# EAGLE board SparkX_smol_ZOE-M8Q-Panel (EAGLE 9.6.2), part 1 of 11
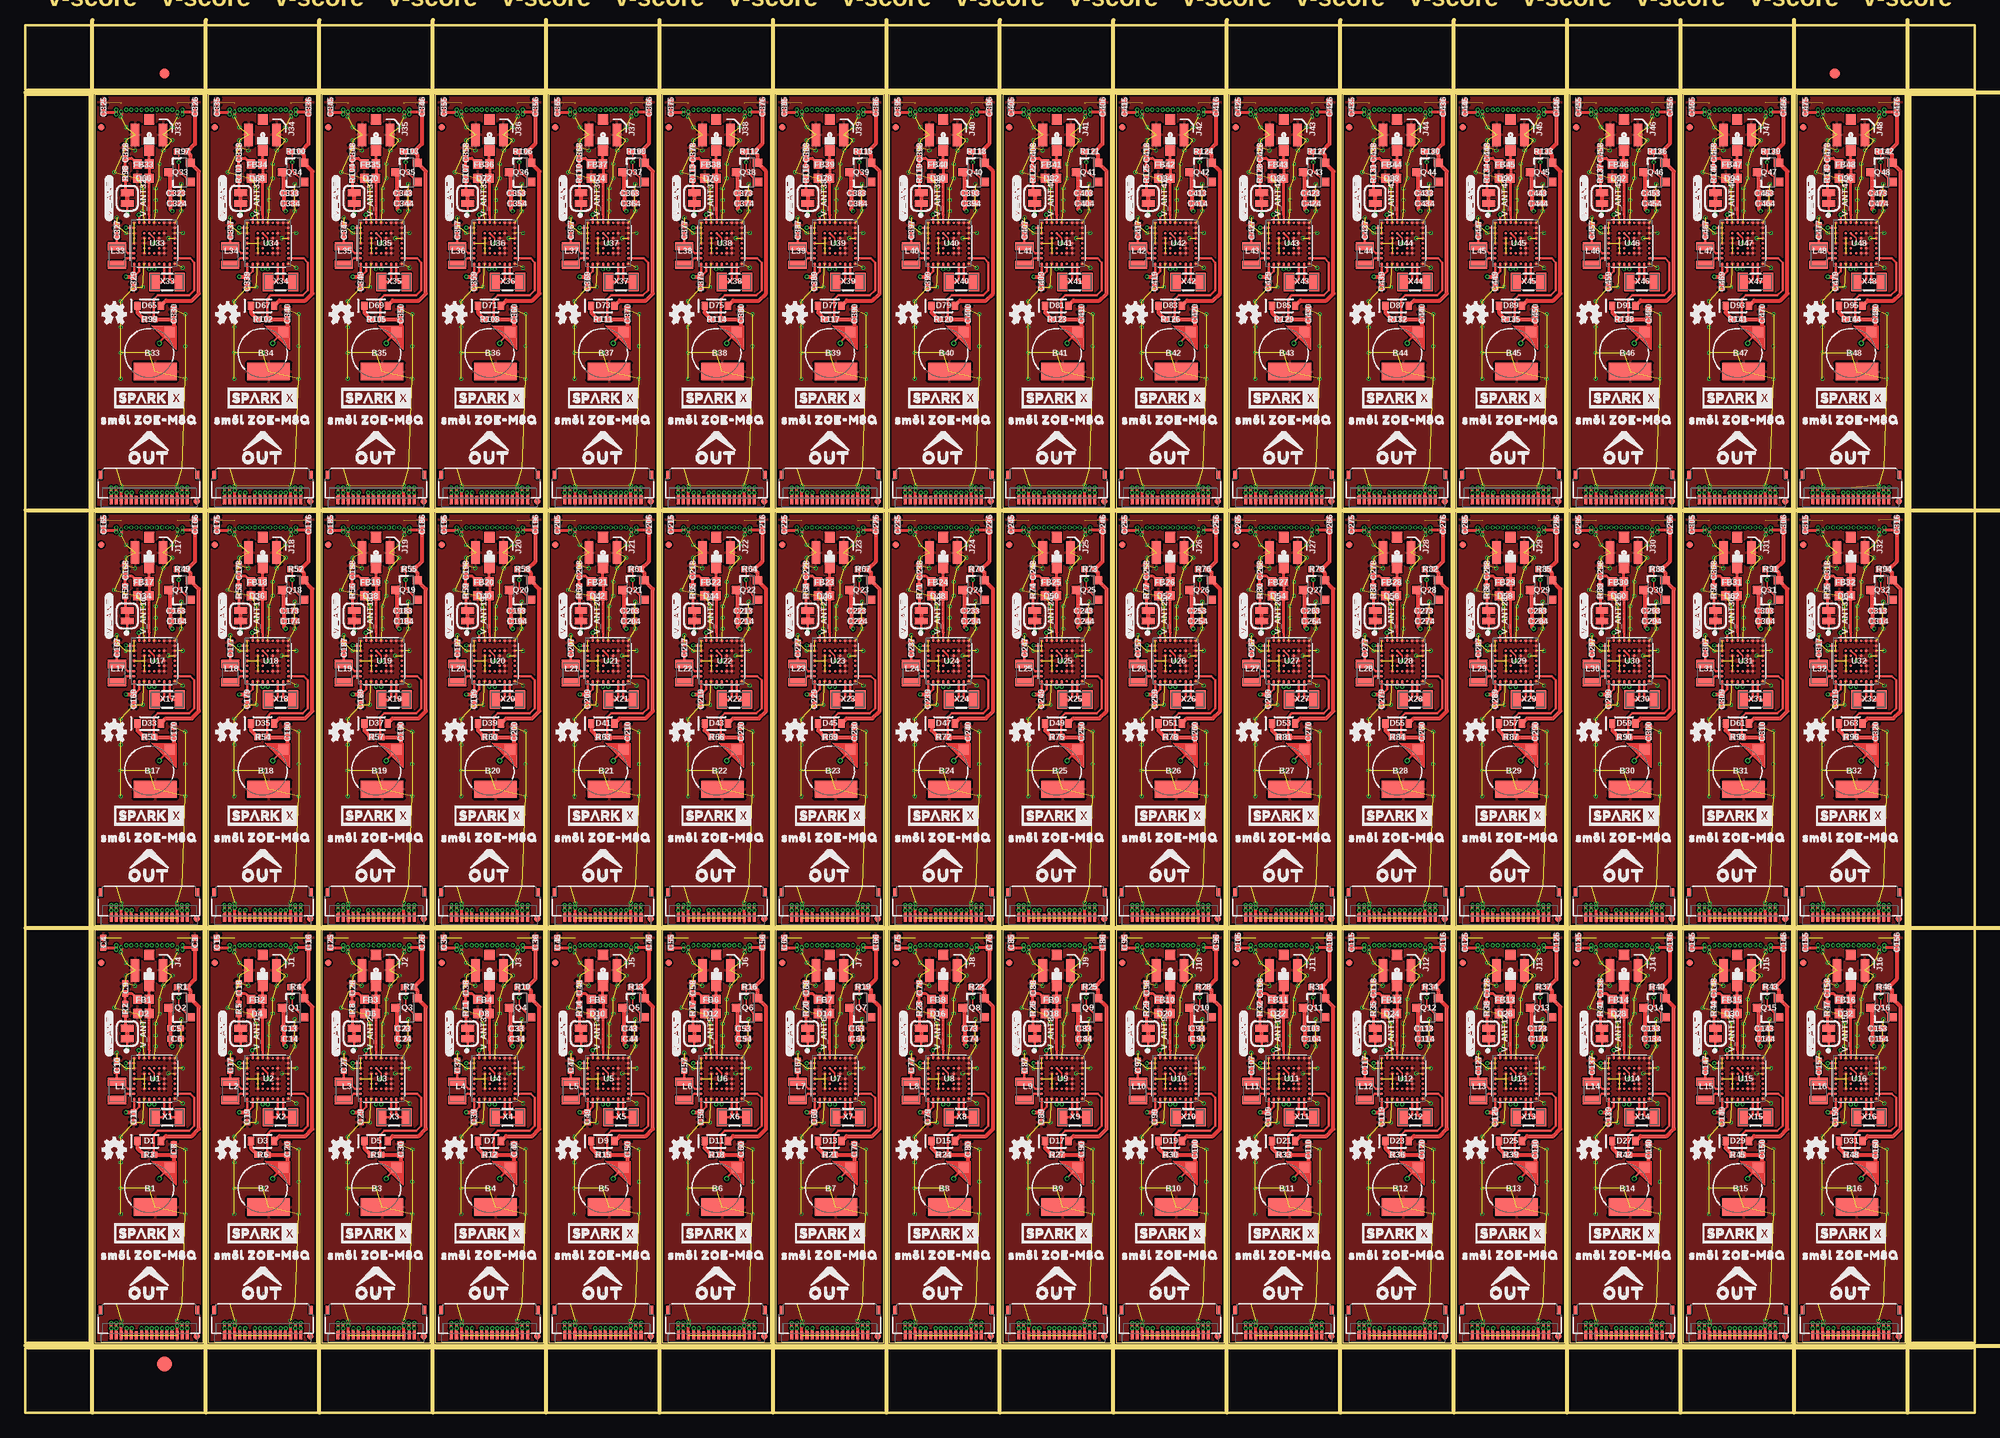
[diagram p0: board, top side]
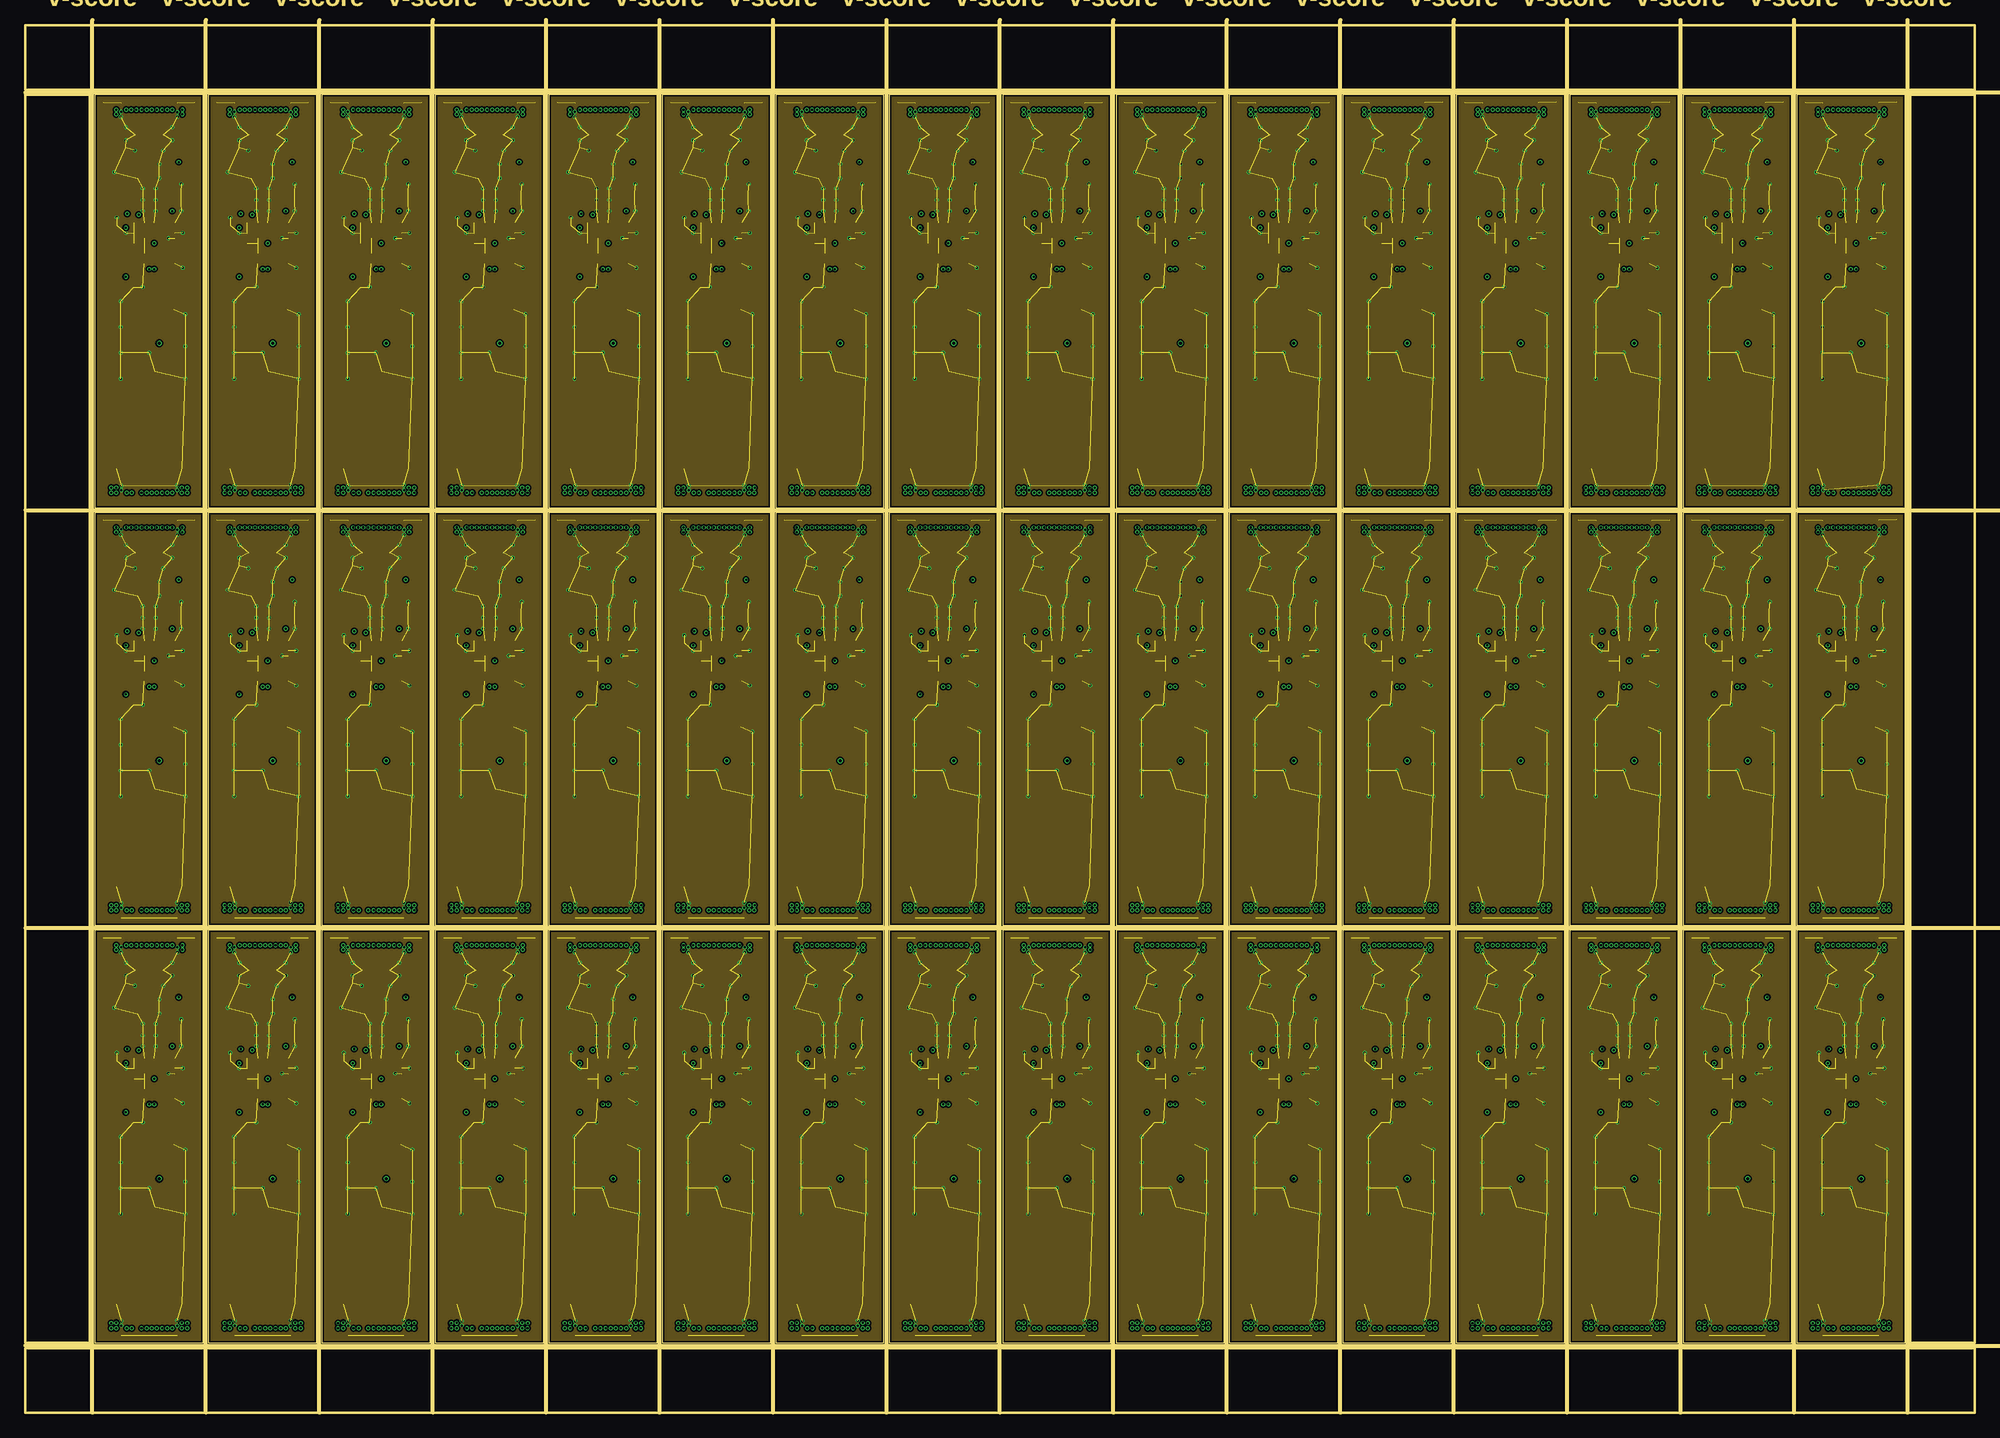
[diagram p1: board, inner layer Route2]
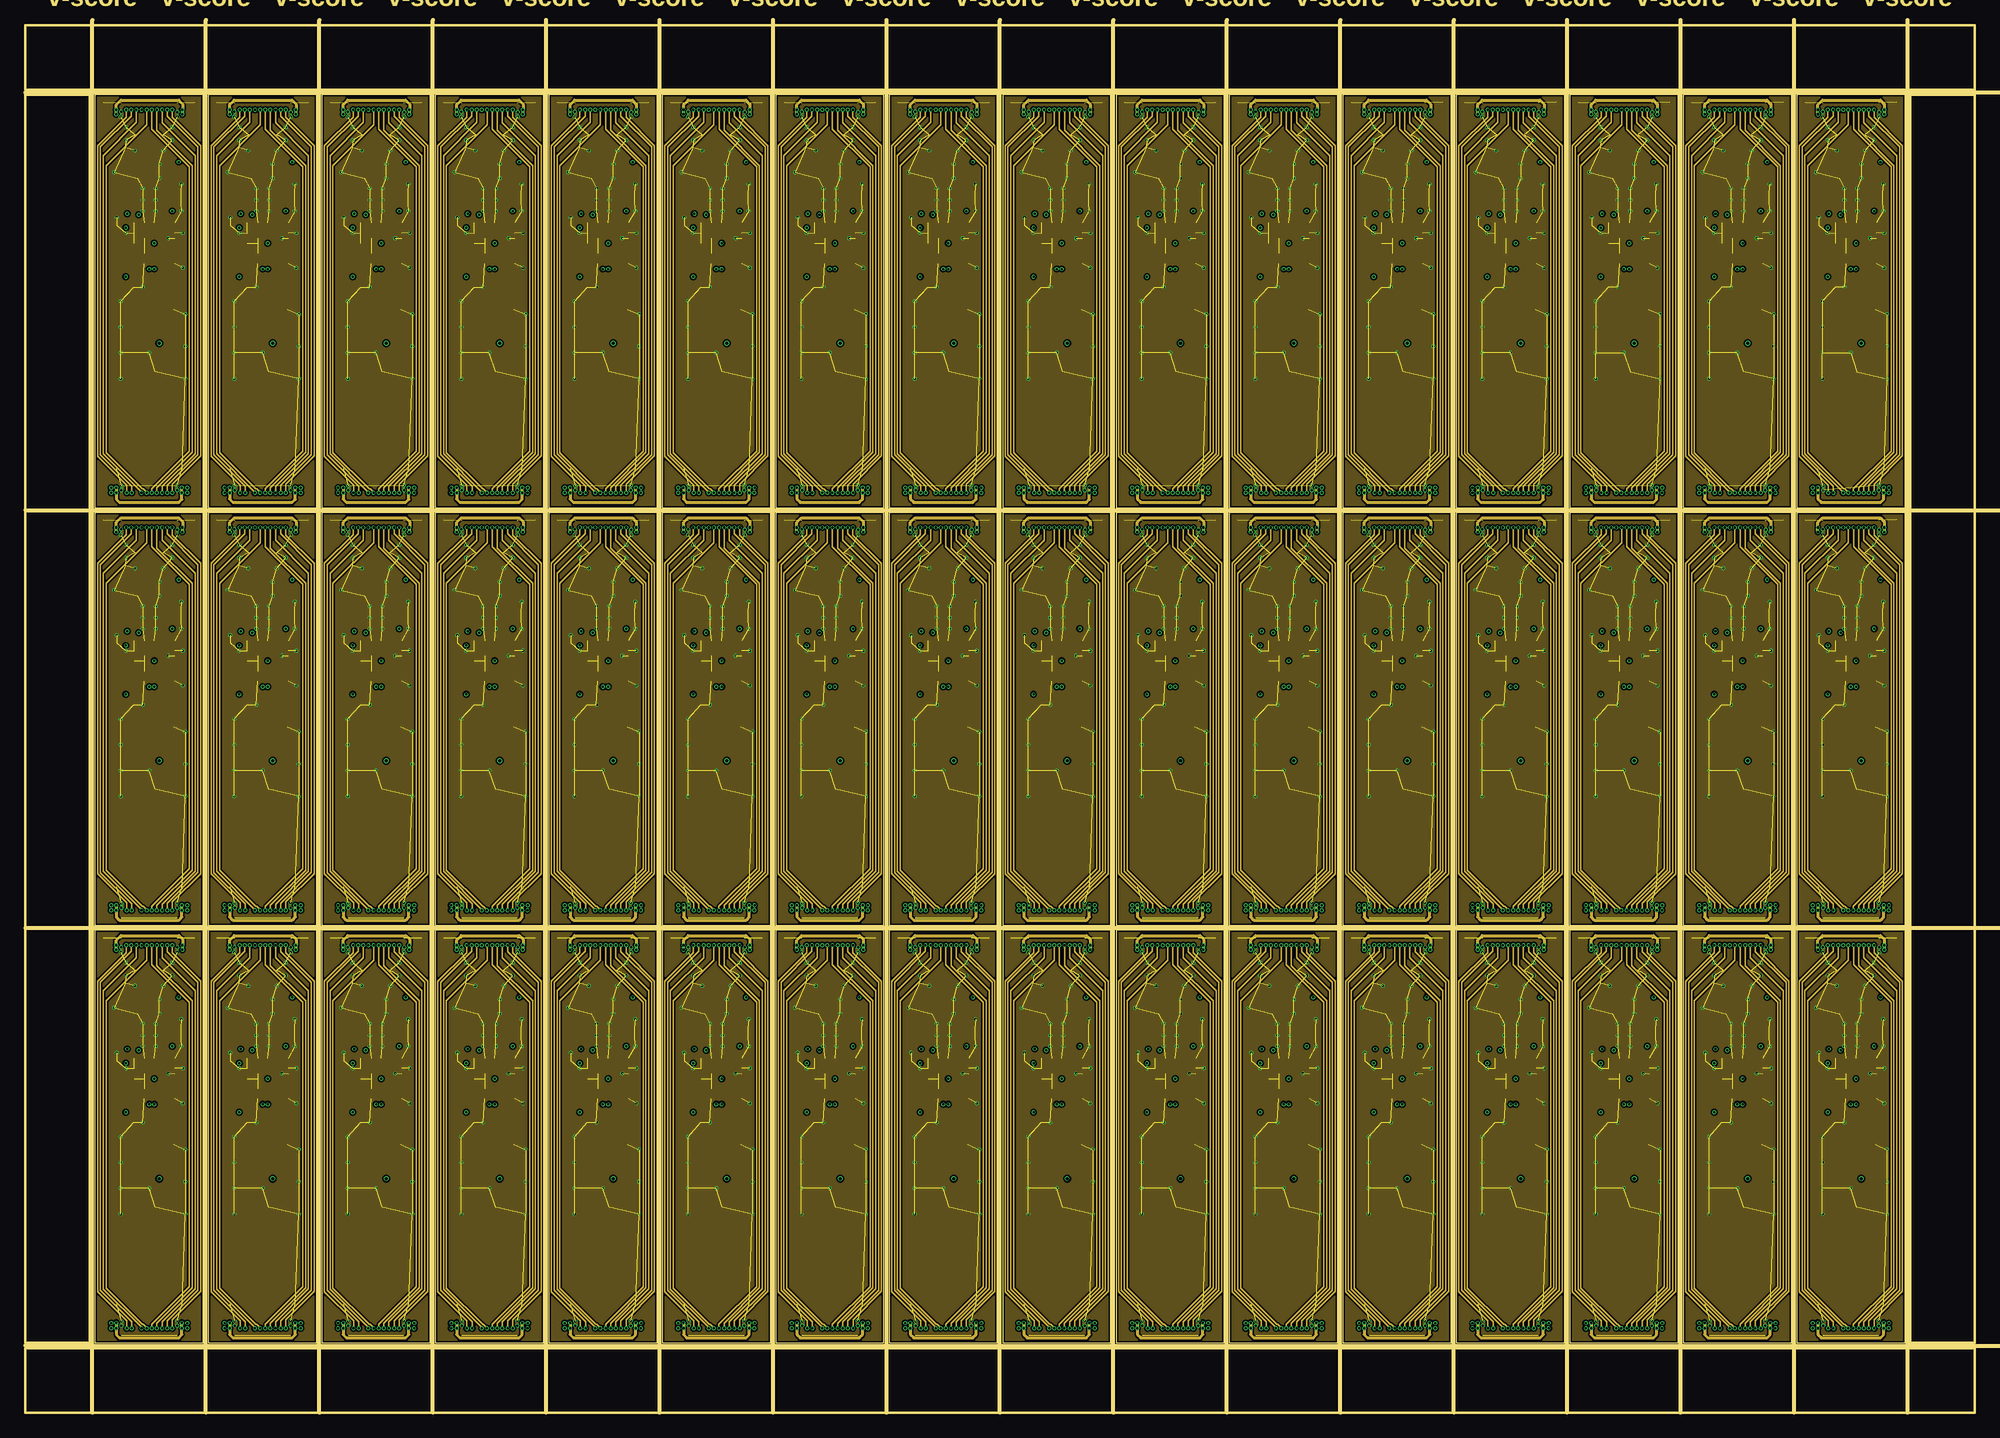
[diagram p2: board, inner layer Route15]
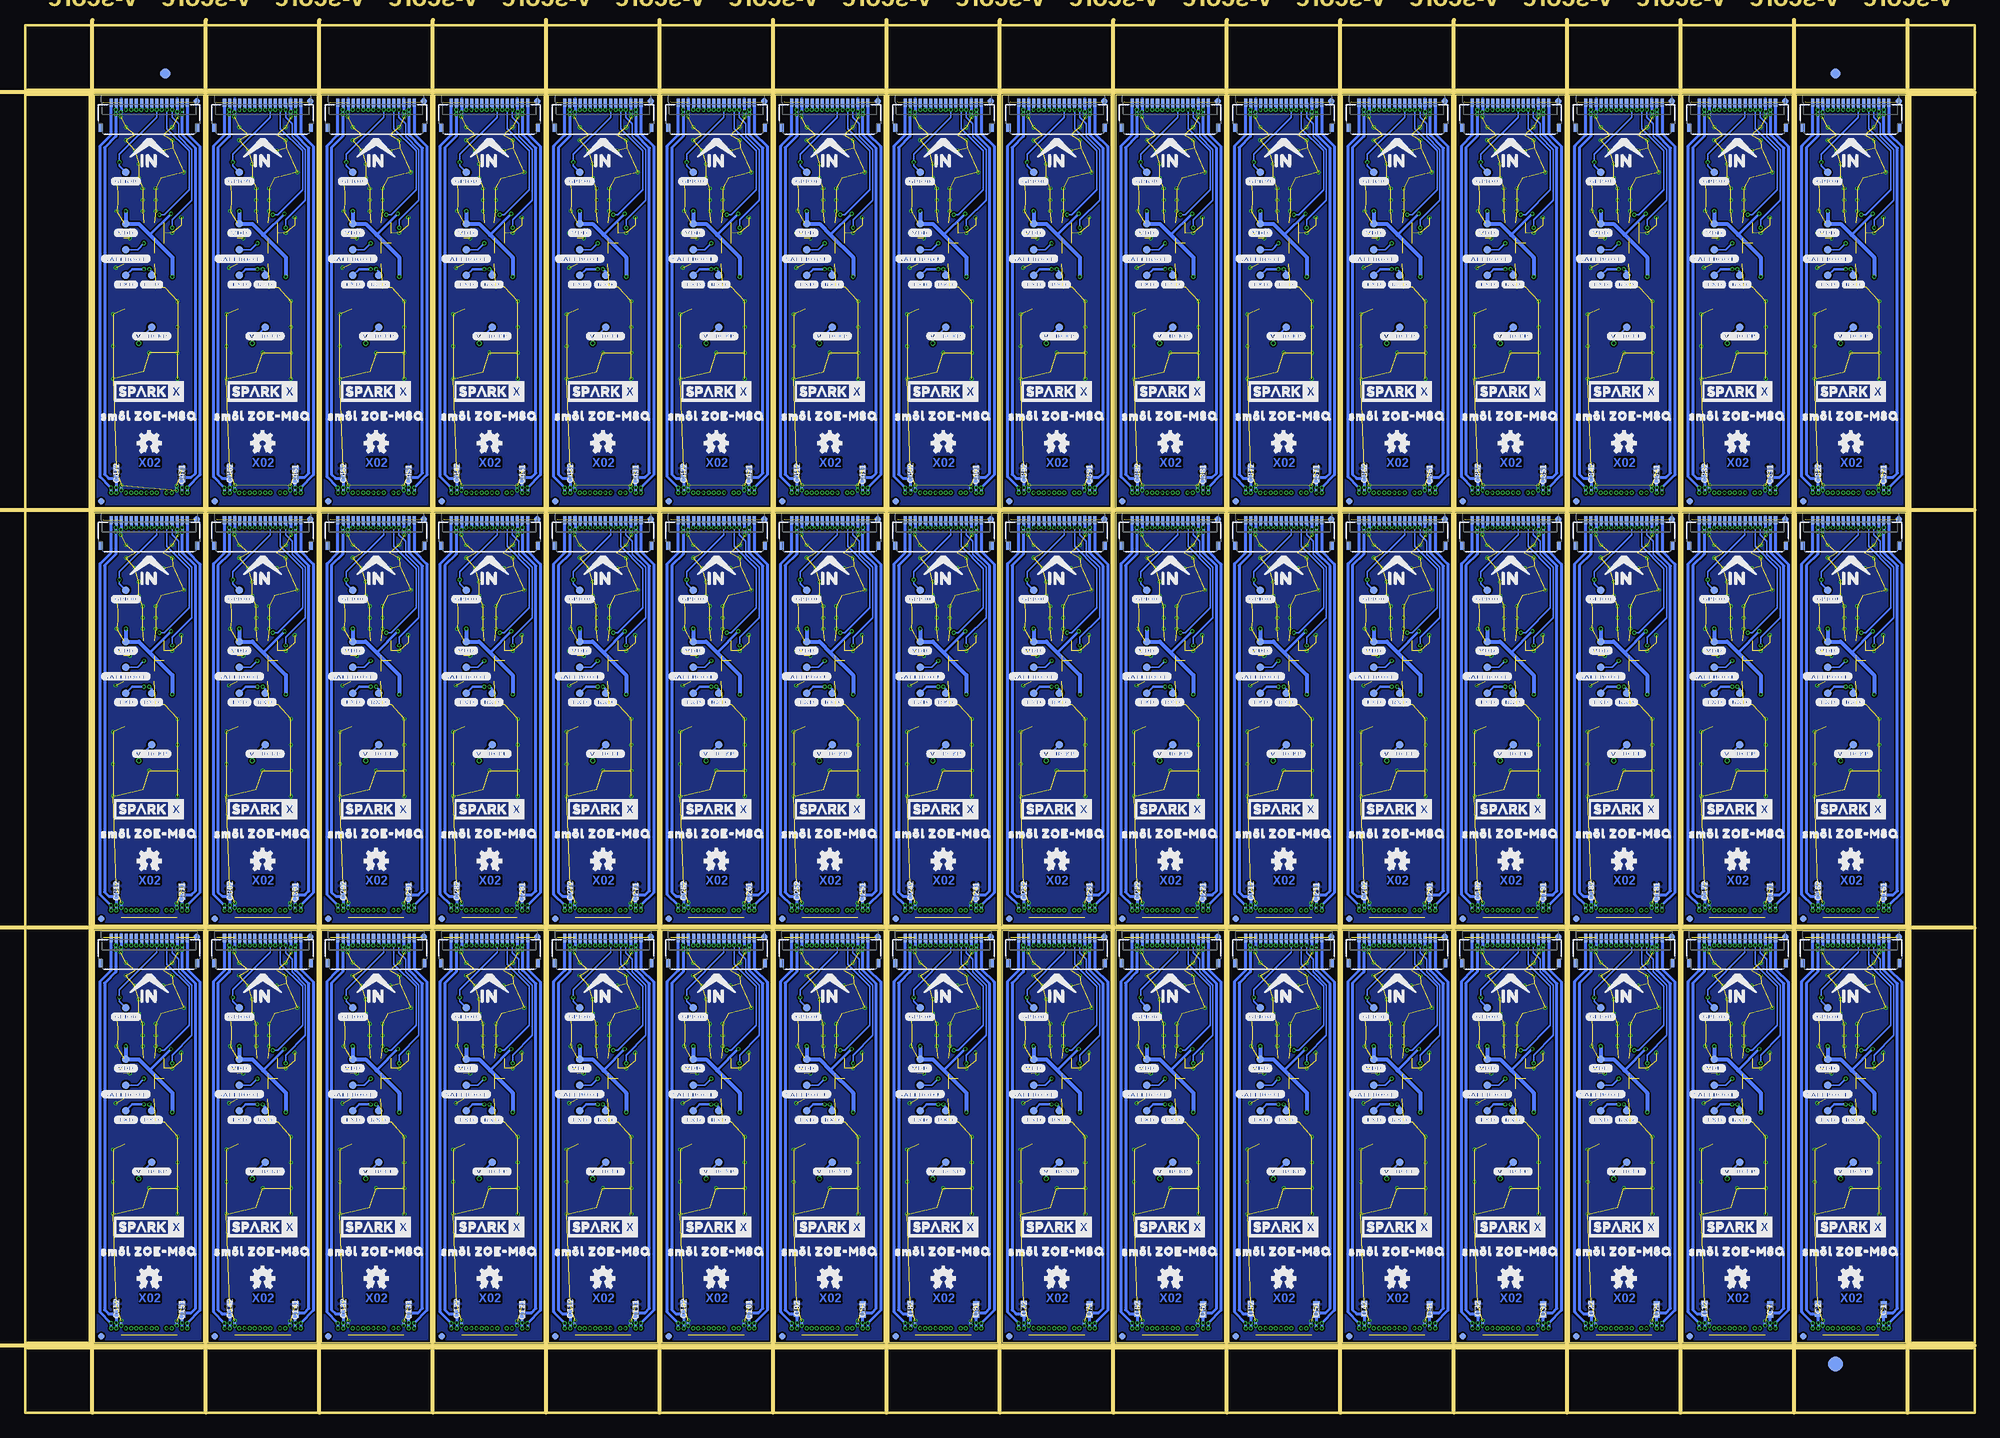
[diagram p3: board, bottom side, seen from below]

Size 192.02 x 136.65 mm. Coordinates in mm from the lower left corner, seen from the top.
Outline: 208 segments
Copper layers (1+2*15+16): Top 0.035mm / dielectric 0.2mm / Route2 0.0175mm / dielectric 0.265mm / Route15 0.0175mm / dielectric 0.2mm / Bottom 0.035mm
Design rules "SparkX_smol_ZOE-M8Q": minimum track width 5mil, minimum drill 0.2mm, track to track 5mil, track to pad 5mil, pad to pad 5mil, via to via 5mil, smd to smd 0mil, copper to edge 5mil, drill to drill 5mil, minimum pad ring 3.5mil, minimum via ring 3.5mil, stop-mask expansion 2.5mil, vias tented up to drill 25mil, thermal gap 10mil
Milling: 21 lines

## Footprints (pad centres in the part's own frame; a part is rotated, then mirrored left to right if it is on the bottom)
PAD.03X.03 = smd 0.762 x 0.762: 1 0,0
ML414H_IV01E = smd 1 x 1: + 2.022,2.032 | smd 4.2 x 1.7: - 0.6,-1.85
0402-TIGHT = smd 0.6 x 0.6: 1 -0.5,0; 2 0.5,0
SOD-323 = smd 0.63 x 0.83: A 1.15,0; C -1.15,0
0402 = smd 0.85 x 0.9: 1 -0.58,0; 2 0.58,0
FIDUCIAL-1X2 = smd 1 x 1: 1 0,0
FIDUCIAL-1.5X3 = smd 1.5 x 1.5: 1 0,0
FIDUCIAL-MICRO = smd 0.635 x 0.635: 1 0,0
FPC_16_0.5MM = smd 0.3 x 0.8: 1 -3.75,1.35; 2 -3.25,1.35; 3 -2.75,1.35; 4 -2.25,1.35; 5 -1.75,1.35; 6 -1.25,1.35; 7 -0.75,1.35; 8 -0.25,1.35; 9 0.25,1.35; 10 0.75,1.35; 11 1.25,1.35; 12 1.75,1.35; 13 2.25,1.35; 14 2.75,1.35; 15 3.25,1.35; 16 3.75,1.35 | smd 0.4 x 0.8: MP1 -4.75,-1.15; MP2 4.75,-1.15
U.FL = smd 2.2 x 0.85: 1 0,1.375; 2 0,-1.375 | smd 1.05 x 1: FEED 1.525,0; NC -1.525,0
0806 = smd 0.8 x 1.8: 1 -0.9,0; 2 0.9,0
SOT23-3 = smd 0.8 x 0.9: 1 -0.95,-1; 2 0.95,-1; 3 0,1.1
UBLOX_ZOE_M8-0-10 = smd 0.25 x 0.25: 1 -1.996,2.004; 2 -1.496,2.004; 3 -0.996,2.004; 4 -0.496,2.004; 5 0.004,2.004; 6 0.504,2.004; 7 1.004,2.004; 8 1.504,2.004; 9 2.004,2.004; 10 2.004,1.504; 11 2.004,1.004; 12 2.004,0.504; 13 2.004,0.004; 14 2.004,-0.496; 15 2.004,-0.996; 16 2.004,-1.496; 17 2.004,-1.996; 18 1.504,-1.996; 19 1.004,-1.996; 20 0.504,-1.996; 21 0.004,-1.996; 22 -0.496,-1.996; 23 -0.996,-1.996; 24 -1.496,-1.996; 25 -1.996,-1.996; 26 -1.996,-1.496; 27 -1.996,-0.996; 28 -1.996,-0.496; 29 -1.996,0.004; 30 -1.996,0.504; 31 -1.996,1.004; 32 -1.996,1.504; 33 -0.996,1.004; 34 -0.496,1.004; 35 0.004,1.004; 36 0.504,1.004; 37 1.004,1.004; 38 1.004,0.004; 39 1.004,-0.496; 40 1.004,-0.996; 41 0.504,-0.996; 42 0.004,-0.996; 43 -0.496,-0.996; 44 -0.996,-0.996; 45 -0.996,-0.496; 46 -0.996,0.004; 47 -0.996,0.504; 48 -0.496,0.504; 49 0.504,0.504; 50 0.504,-0.496; 51 -0.496,-0.496
SMT-JUMPER_2_NC_TRACE_SILK = smd 0.66 x 1.27: 1 -0.521,0; 2 0.521,0
CRYSTAL-SMD-3.2X1.5MM = smd 1 x 1.8: P$1 -1.25,0; P$2 1.25,0

## Placement (x,y rotation side)
!SAFEBOOT!  TEST-POINT3  [PAD.03X.03]  14.48,32.26 0 bottom
!SAFEBOOT!1  TEST-POINT3  [PAD.03X.03]  25.65,32.26 0 bottom
!SAFEBOOT!2  TEST-POINT3  [PAD.03X.03]  36.83,32.26 0 bottom
!SAFEBOOT!3  TEST-POINT3  [PAD.03X.03]  48.01,32.26 0 bottom
!SAFEBOOT!4  TEST-POINT3  [PAD.03X.03]  59.18,32.26 0 bottom
!SAFEBOOT!5  TEST-POINT3  [PAD.03X.03]  70.36,32.26 0 bottom
!SAFEBOOT!6  TEST-POINT3  [PAD.03X.03]  81.53,32.26 0 bottom
!SAFEBOOT!7  TEST-POINT3  [PAD.03X.03]  92.71,32.26 0 bottom
!SAFEBOOT!8  TEST-POINT3  [PAD.03X.03]  103.89,32.26 0 bottom
!SAFEBOOT!9  TEST-POINT3  [PAD.03X.03]  115.06,32.26 0 bottom
!SAFEBOOT!10  TEST-POINT3  [PAD.03X.03]  126.24,32.26 0 bottom
!SAFEBOOT!11  TEST-POINT3  [PAD.03X.03]  137.41,32.26 0 bottom
!SAFEBOOT!12  TEST-POINT3  [PAD.03X.03]  148.59,32.26 0 bottom
!SAFEBOOT!13  TEST-POINT3  [PAD.03X.03]  159.77,32.26 0 bottom
!SAFEBOOT!14  TEST-POINT3  [PAD.03X.03]  170.94,32.26 0 bottom
!SAFEBOOT!15  TEST-POINT3  [PAD.03X.03]  182.12,32.26 0 bottom
!SAFEBOOT!16  TEST-POINT3  [PAD.03X.03]  14.48,73.41 0 bottom
!SAFEBOOT!17  TEST-POINT3  [PAD.03X.03]  25.65,73.41 0 bottom
!SAFEBOOT!18  TEST-POINT3  [PAD.03X.03]  36.83,73.41 0 bottom
!SAFEBOOT!19  TEST-POINT3  [PAD.03X.03]  48.01,73.41 0 bottom
!SAFEBOOT!20  TEST-POINT3  [PAD.03X.03]  59.18,73.41 0 bottom
!SAFEBOOT!21  TEST-POINT3  [PAD.03X.03]  70.36,73.41 0 bottom
!SAFEBOOT!22  TEST-POINT3  [PAD.03X.03]  81.53,73.41 0 bottom
!SAFEBOOT!23  TEST-POINT3  [PAD.03X.03]  92.71,73.41 0 bottom
!SAFEBOOT!24  TEST-POINT3  [PAD.03X.03]  103.89,73.41 0 bottom
!SAFEBOOT!25  TEST-POINT3  [PAD.03X.03]  115.06,73.41 0 bottom
!SAFEBOOT!26  TEST-POINT3  [PAD.03X.03]  126.24,73.41 0 bottom
!SAFEBOOT!27  TEST-POINT3  [PAD.03X.03]  137.41,73.41 0 bottom
!SAFEBOOT!28  TEST-POINT3  [PAD.03X.03]  148.59,73.41 0 bottom
!SAFEBOOT!29  TEST-POINT3  [PAD.03X.03]  159.77,73.41 0 bottom
!SAFEBOOT!30  TEST-POINT3  [PAD.03X.03]  170.94,73.41 0 bottom
!SAFEBOOT!31  TEST-POINT3  [PAD.03X.03]  182.12,73.41 0 bottom
!SAFEBOOT!32  TEST-POINT3  [PAD.03X.03]  14.48,114.55 0 bottom
!SAFEBOOT!33  TEST-POINT3  [PAD.03X.03]  25.65,114.55 0 bottom
!SAFEBOOT!34  TEST-POINT3  [PAD.03X.03]  36.83,114.55 0 bottom
!SAFEBOOT!35  TEST-POINT3  [PAD.03X.03]  48.01,114.55 0 bottom
!SAFEBOOT!36  TEST-POINT3  [PAD.03X.03]  59.18,114.55 0 bottom
!SAFEBOOT!37  TEST-POINT3  [PAD.03X.03]  70.36,114.55 0 bottom
!SAFEBOOT!38  TEST-POINT3  [PAD.03X.03]  81.53,114.55 0 bottom
!SAFEBOOT!39  TEST-POINT3  [PAD.03X.03]  92.71,114.55 0 bottom
!SAFEBOOT!40  TEST-POINT3  [PAD.03X.03]  103.89,114.55 0 bottom
!SAFEBOOT!41  TEST-POINT3  [PAD.03X.03]  115.06,114.55 0 bottom
!SAFEBOOT!42  TEST-POINT3  [PAD.03X.03]  126.24,114.55 0 bottom
!SAFEBOOT!43  TEST-POINT3  [PAD.03X.03]  137.41,114.55 0 bottom
!SAFEBOOT!44  TEST-POINT3  [PAD.03X.03]  148.59,114.55 0 bottom
!SAFEBOOT!45  TEST-POINT3  [PAD.03X.03]  159.77,114.55 0 bottom
!SAFEBOOT!46  TEST-POINT3  [PAD.03X.03]  170.94,114.55 0 bottom
!SAFEBOOT!47  TEST-POINT3  [PAD.03X.03]  182.12,114.55 0 bottom
B1  6.8MM_COIN_CELL  [ML414H_IV01E]  12.19,22.1 0 top
B2  6.8MM_COIN_CELL  [ML414H_IV01E]  23.37,22.1 0 top
B3  6.8MM_COIN_CELL  [ML414H_IV01E]  34.54,22.1 0 top
B4  6.8MM_COIN_CELL  [ML414H_IV01E]  45.72,22.1 0 top
B5  6.8MM_COIN_CELL  [ML414H_IV01E]  56.9,22.1 0 top
B6  6.8MM_COIN_CELL  [ML414H_IV01E]  68.07,22.1 0 top
B7  6.8MM_COIN_CELL  [ML414H_IV01E]  79.25,22.1 0 top
B8  6.8MM_COIN_CELL  [ML414H_IV01E]  90.42,22.1 0 top
B9  6.8MM_COIN_CELL  [ML414H_IV01E]  101.6,22.1 0 top
B10  6.8MM_COIN_CELL  [ML414H_IV01E]  112.78,22.1 0 top
B11  6.8MM_COIN_CELL  [ML414H_IV01E]  123.95,22.1 0 top
B12  6.8MM_COIN_CELL  [ML414H_IV01E]  135.13,22.1 0 top
B13  6.8MM_COIN_CELL  [ML414H_IV01E]  146.3,22.1 0 top
B14  6.8MM_COIN_CELL  [ML414H_IV01E]  157.48,22.1 0 top
B15  6.8MM_COIN_CELL  [ML414H_IV01E]  168.66,22.1 0 top
B16  6.8MM_COIN_CELL  [ML414H_IV01E]  179.83,22.1 0 top
B17  6.8MM_COIN_CELL  [ML414H_IV01E]  12.19,63.25 0 top
B18  6.8MM_COIN_CELL  [ML414H_IV01E]  23.37,63.25 0 top
B19  6.8MM_COIN_CELL  [ML414H_IV01E]  34.54,63.25 0 top
B20  6.8MM_COIN_CELL  [ML414H_IV01E]  45.72,63.25 0 top
B21  6.8MM_COIN_CELL  [ML414H_IV01E]  56.9,63.25 0 top
B22  6.8MM_COIN_CELL  [ML414H_IV01E]  68.07,63.25 0 top
B23  6.8MM_COIN_CELL  [ML414H_IV01E]  79.25,63.25 0 top
B24  6.8MM_COIN_CELL  [ML414H_IV01E]  90.42,63.25 0 top
B25  6.8MM_COIN_CELL  [ML414H_IV01E]  101.6,63.25 0 top
B26  6.8MM_COIN_CELL  [ML414H_IV01E]  112.78,63.25 0 top
B27  6.8MM_COIN_CELL  [ML414H_IV01E]  123.95,63.25 0 top
B28  6.8MM_COIN_CELL  [ML414H_IV01E]  135.13,63.25 0 top
B29  6.8MM_COIN_CELL  [ML414H_IV01E]  146.3,63.25 0 top
B30  6.8MM_COIN_CELL  [ML414H_IV01E]  157.48,63.25 0 top
B31  6.8MM_COIN_CELL  [ML414H_IV01E]  168.66,63.25 0 top
B32  6.8MM_COIN_CELL  [ML414H_IV01E]  179.83,63.25 0 top
B33  6.8MM_COIN_CELL  [ML414H_IV01E]  12.19,104.39 0 top
B34  6.8MM_COIN_CELL  [ML414H_IV01E]  23.37,104.39 0 top
B35  6.8MM_COIN_CELL  [ML414H_IV01E]  34.54,104.39 0 top
B36  6.8MM_COIN_CELL  [ML414H_IV01E]  45.72,104.39 0 top
B37  6.8MM_COIN_CELL  [ML414H_IV01E]  56.9,104.39 0 top
B38  6.8MM_COIN_CELL  [ML414H_IV01E]  68.07,104.39 0 top
B39  6.8MM_COIN_CELL  [ML414H_IV01E]  79.25,104.39 0 top
B40  6.8MM_COIN_CELL  [ML414H_IV01E]  90.42,104.39 0 top
B41  6.8MM_COIN_CELL  [ML414H_IV01E]  101.6,104.39 0 top
B42  6.8MM_COIN_CELL  [ML414H_IV01E]  112.78,104.39 0 top
B43  6.8MM_COIN_CELL  [ML414H_IV01E]  123.95,104.39 0 top
B44  6.8MM_COIN_CELL  [ML414H_IV01E]  135.13,104.39 0 top
B45  6.8MM_COIN_CELL  [ML414H_IV01E]  146.3,104.39 0 top
B46  6.8MM_COIN_CELL  [ML414H_IV01E]  157.48,104.39 0 top
B47  6.8MM_COIN_CELL  [ML414H_IV01E]  168.66,104.39 0 top
B48  6.8MM_COIN_CELL  [ML414H_IV01E]  179.83,104.39 0 top
C1  2.2uF  [0402-TIGHT]  8.95,10.16 90 bottom
C2  2.2uF  [0402-TIGHT]  15.43,10.22 90 bottom
C3  2.2uF  [0402-TIGHT]  16.7,46.29 90 top
C4  2.2uF  [0402-TIGHT]  7.68,46.29 90 top
C5  2.2uF  [0402-TIGHT]  14.8,37.85 0 top
C6  0.1uF  [0402-TIGHT]  14.8,36.83 0 top
C7  2.2uF  [0402-TIGHT]  20.13,10.16 90 bottom
C8  1.0uF  [0402-TIGHT]  14.61,25.91 90 top
C9  47PF-0402_TIGHT-25V-5%-X7R  [0402-TIGHT]  9.84,41.78 90 top
C10  4.7uF  [0402-TIGHT]  9.02,34.16 90 top
C11  0.1uF  [0402-TIGHT]  10.67,29.08 270 top
C12  2.2uF  [0402-TIGHT]  26.61,10.22 90 bottom
C13  2.2uF  [0402-TIGHT]  25.97,37.85 0 top
C14  0.1uF  [0402-TIGHT]  25.97,36.83 0 top
C15  2.2uF  [0402-TIGHT]  18.86,46.29 90 top
C16  2.2uF  [0402-TIGHT]  27.88,46.29 90 top
C17  4.7uF  [0402-TIGHT]  20.19,34.16 90 top
C18  47PF-0402_TIGHT-25V-5%-X7R  [0402-TIGHT]  21.02,41.78 90 top
C19  0.1uF  [0402-TIGHT]  21.84,29.08 270 top
C20  1.0uF  [0402-TIGHT]  25.78,25.91 90 top
C21  2.2uF  [0402-TIGHT]  31.31,10.16 90 bottom
C22  2.2uF  [0402-TIGHT]  37.78,10.22 90 bottom
C23  2.2uF  [0402-TIGHT]  37.15,37.85 0 top
C24  0.1uF  [0402-TIGHT]  37.15,36.83 0 top
C25  2.2uF  [0402-TIGHT]  30.04,46.29 90 top
C26  2.2uF  [0402-TIGHT]  39.05,46.29 90 top
C27  4.7uF  [0402-TIGHT]  31.37,34.16 90 top
C28  47PF-0402_TIGHT-25V-5%-X7R  [0402-TIGHT]  32.19,41.78 90 top
C29  0.1uF  [0402-TIGHT]  33.02,29.08 270 top
C30  1.0uF  [0402-TIGHT]  36.96,25.91 90 top
C31  2.2uF  [0402-TIGHT]  42.48,10.16 90 bottom
C32  2.2uF  [0402-TIGHT]  48.96,10.22 90 bottom
C33  2.2uF  [0402-TIGHT]  48.32,37.85 0 top
C34  0.1uF  [0402-TIGHT]  48.32,36.83 0 top
C35  2.2uF  [0402-TIGHT]  41.21,46.29 90 top
C36  2.2uF  [0402-TIGHT]  50.23,46.29 90 top
C37  4.7uF  [0402-TIGHT]  42.54,34.16 90 top
C38  47PF-0402_TIGHT-25V-5%-X7R  [0402-TIGHT]  43.37,41.78 90 top
C39  0.1uF  [0402-TIGHT]  44.2,29.08 270 top
C40  1.0uF  [0402-TIGHT]  48.13,25.91 90 top
C41  2.2uF  [0402-TIGHT]  53.66,10.16 90 bottom
C42  2.2uF  [0402-TIGHT]  60.13,10.22 90 bottom
C43  2.2uF  [0402-TIGHT]  59.5,37.85 0 top
C44  0.1uF  [0402-TIGHT]  59.5,36.83 0 top
C45  2.2uF  [0402-TIGHT]  52.39,46.29 90 top
C46  2.2uF  [0402-TIGHT]  61.4,46.29 90 top
C47  4.7uF  [0402-TIGHT]  53.72,34.16 90 top
C48  47PF-0402_TIGHT-25V-5%-X7R  [0402-TIGHT]  54.55,41.78 90 top
C49  0.1uF  [0402-TIGHT]  55.37,29.08 270 top
C50  1.0uF  [0402-TIGHT]  59.31,25.91 90 top
C51  2.2uF  [0402-TIGHT]  64.83,10.16 90 bottom
C52  2.2uF  [0402-TIGHT]  71.31,10.22 90 bottom
C53  2.2uF  [0402-TIGHT]  70.68,37.85 0 top
C54  0.1uF  [0402-TIGHT]  70.68,36.83 0 top
C55  2.2uF  [0402-TIGHT]  63.56,46.29 90 top
C56  2.2uF  [0402-TIGHT]  72.58,46.29 90 top
C57  4.7uF  [0402-TIGHT]  64.9,34.16 90 top
C58  47PF-0402_TIGHT-25V-5%-X7R  [0402-TIGHT]  65.72,41.78 90 top
C59  0.1uF  [0402-TIGHT]  66.55,29.08 270 top
C60  1.0uF  [0402-TIGHT]  70.48,25.91 90 top
C61  2.2uF  [0402-TIGHT]  76.01,10.16 90 bottom
C62  2.2uF  [0402-TIGHT]  82.49,10.22 90 bottom
C63  2.2uF  [0402-TIGHT]  81.85,37.85 0 top
C64  0.1uF  [0402-TIGHT]  81.85,36.83 0 top
C65  2.2uF  [0402-TIGHT]  74.74,46.29 90 top
C66  2.2uF  [0402-TIGHT]  83.76,46.29 90 top
C67  4.7uF  [0402-TIGHT]  76.07,34.16 90 top
C68  47PF-0402_TIGHT-25V-5%-X7R  [0402-TIGHT]  76.9,41.78 90 top
C69  0.1uF  [0402-TIGHT]  77.72,29.08 270 top
C70  1.0uF  [0402-TIGHT]  81.66,25.91 90 top
C71  2.2uF  [0402-TIGHT]  87.19,10.16 90 bottom
C72  2.2uF  [0402-TIGHT]  93.66,10.22 90 bottom
C73  2.2uF  [0402-TIGHT]  93.03,37.85 0 top
C74  0.1uF  [0402-TIGHT]  93.03,36.83 0 top
C75  2.2uF  [0402-TIGHT]  85.92,46.29 90 top
C76  2.2uF  [0402-TIGHT]  94.93,46.29 90 top
C77  4.7uF  [0402-TIGHT]  87.25,34.16 90 top
C78  47PF-0402_TIGHT-25V-5%-X7R  [0402-TIGHT]  88.07,41.78 90 top
C79  0.1uF  [0402-TIGHT]  88.9,29.08 270 top
C80  1.0uF  [0402-TIGHT]  92.84,25.91 90 top
C81  2.2uF  [0402-TIGHT]  98.36,10.16 90 bottom
C82  2.2uF  [0402-TIGHT]  104.84,10.22 90 bottom
C83  2.2uF  [0402-TIGHT]  104.2,37.85 0 top
C84  0.1uF  [0402-TIGHT]  104.2,36.83 0 top
C85  2.2uF  [0402-TIGHT]  97.09,46.29 90 top
C86  2.2uF  [0402-TIGHT]  106.11,46.29 90 top
C87  4.7uF  [0402-TIGHT]  98.42,34.16 90 top
C88  47PF-0402_TIGHT-25V-5%-X7R  [0402-TIGHT]  99.25,41.78 90 top
C89  0.1uF  [0402-TIGHT]  100.08,29.08 270 top
C90  1.0uF  [0402-TIGHT]  104.01,25.91 90 top
C91  2.2uF  [0402-TIGHT]  109.54,10.16 90 bottom
C92  2.2uF  [0402-TIGHT]  116.01,10.22 90 bottom
C93  2.2uF  [0402-TIGHT]  115.38,37.85 0 top
C94  0.1uF  [0402-TIGHT]  115.38,36.83 0 top
C95  2.2uF  [0402-TIGHT]  108.27,46.29 90 top
C96  2.2uF  [0402-TIGHT]  117.28,46.29 90 top
C97  4.7uF  [0402-TIGHT]  109.6,34.16 90 top
C98  47PF-0402_TIGHT-25V-5%-X7R  [0402-TIGHT]  110.43,41.78 90 top
C99  0.1uF  [0402-TIGHT]  111.25,29.08 270 top
C100  1.0uF  [0402-TIGHT]  115.19,25.91 90 top
C101  2.2uF  [0402-TIGHT]  120.71,10.16 90 bottom
C102  2.2uF  [0402-TIGHT]  127.19,10.22 90 bottom
C103  2.2uF  [0402-TIGHT]  126.56,37.85 0 top
C104  0.1uF  [0402-TIGHT]  126.56,36.83 0 top
C105  2.2uF  [0402-TIGHT]  119.44,46.29 90 top
C106  2.2uF  [0402-TIGHT]  128.46,46.29 90 top
C107  4.7uF  [0402-TIGHT]  120.78,34.16 90 top
C108  47PF-0402_TIGHT-25V-5%-X7R  [0402-TIGHT]  121.6,41.78 90 top
C109  0.1uF  [0402-TIGHT]  122.43,29.08 270 top
C110  1.0uF  [0402-TIGHT]  126.37,25.91 90 top
C111  2.2uF  [0402-TIGHT]  131.89,10.16 90 bottom
C112  2.2uF  [0402-TIGHT]  138.37,10.22 90 bottom
C113  2.2uF  [0402-TIGHT]  137.73,37.85 0 top
C114  0.1uF  [0402-TIGHT]  137.73,36.83 0 top
C115  2.2uF  [0402-TIGHT]  130.62,46.29 90 top
C116  2.2uF  [0402-TIGHT]  139.64,46.29 90 top
C117  4.7uF  [0402-TIGHT]  131.95,34.16 90 top
C118  47PF-0402_TIGHT-25V-5%-X7R  [0402-TIGHT]  132.78,41.78 90 top
C119  0.1uF  [0402-TIGHT]  133.6,29.08 270 top
C120  1.0uF  [0402-TIGHT]  137.54,25.91 90 top
C121  2.2uF  [0402-TIGHT]  143.07,10.16 90 bottom
C122  2.2uF  [0402-TIGHT]  149.54,10.22 90 bottom
C123  2.2uF  [0402-TIGHT]  148.91,37.85 0 top
C124  0.1uF  [0402-TIGHT]  148.91,36.83 0 top
C125  2.2uF  [0402-TIGHT]  141.8,46.29 90 top
C126  2.2uF  [0402-TIGHT]  150.81,46.29 90 top
C127  4.7uF  [0402-TIGHT]  143.13,34.16 90 top
C128  47PF-0402_TIGHT-25V-5%-X7R  [0402-TIGHT]  143.95,41.78 90 top
C129  0.1uF  [0402-TIGHT]  144.78,29.08 270 top
C130  1.0uF  [0402-TIGHT]  148.72,25.91 90 top
C131  2.2uF  [0402-TIGHT]  154.24,10.16 90 bottom
C132  2.2uF  [0402-TIGHT]  160.72,10.22 90 bottom
C133  2.2uF  [0402-TIGHT]  160.08,37.85 0 top
C134  0.1uF  [0402-TIGHT]  160.08,36.83 0 top
C135  2.2uF  [0402-TIGHT]  152.97,46.29 90 top
C136  2.2uF  [0402-TIGHT]  161.99,46.29 90 top
C137  4.7uF  [0402-TIGHT]  154.31,34.16 90 top
C138  47PF-0402_TIGHT-25V-5%-X7R  [0402-TIGHT]  155.13,41.78 90 top
C139  0.1uF  [0402-TIGHT]  155.96,29.08 270 top
C140  1.0uF  [0402-TIGHT]  159.89,25.91 90 top
C141  2.2uF  [0402-TIGHT]  165.42,10.16 90 bottom
C142  2.2uF  [0402-TIGHT]  171.89,10.22 90 bottom
C143  2.2uF  [0402-TIGHT]  171.26,37.85 0 top
C144  0.1uF  [0402-TIGHT]  171.26,36.83 0 top
C145  2.2uF  [0402-TIGHT]  164.15,46.29 90 top
C146  2.2uF  [0402-TIGHT]  173.16,46.29 90 top
C147  4.7uF  [0402-TIGHT]  165.48,34.16 90 top
C148  47PF-0402_TIGHT-25V-5%-X7R  [0402-TIGHT]  166.31,41.78 90 top
C149  0.1uF  [0402-TIGHT]  167.13,29.08 270 top
C150  1.0uF  [0402-TIGHT]  171.07,25.91 90 top
C151  2.2uF  [0402-TIGHT]  176.59,10.16 90 bottom
C152  2.2uF  [0402-TIGHT]  183.07,10.22 90 bottom
C153  2.2uF  [0402-TIGHT]  182.44,37.85 0 top
C154  0.1uF  [0402-TIGHT]  182.44,36.83 0 top
C155  2.2uF  [0402-TIGHT]  175.32,46.29 90 top
C156  2.2uF  [0402-TIGHT]  184.34,46.29 90 top
C157  4.7uF  [0402-TIGHT]  176.66,34.16 90 top
C158  47PF-0402_TIGHT-25V-5%-X7R  [0402-TIGHT]  177.48,41.78 90 top
C159  0.1uF  [0402-TIGHT]  178.31,29.08 270 top
C160  1.0uF  [0402-TIGHT]  182.25,25.91 90 top
C161  2.2uF  [0402-TIGHT]  8.95,51.31 90 bottom
C162  2.2uF  [0402-TIGHT]  15.43,51.37 90 bottom
C163  2.2uF  [0402-TIGHT]  14.8,78.99 0 top
C164  0.1uF  [0402-TIGHT]  14.8,77.98 0 top
C165  2.2uF  [0402-TIGHT]  7.68,87.44 90 top
C166  2.2uF  [0402-TIGHT]  16.7,87.44 90 top
C167  4.7uF  [0402-TIGHT]  9.02,75.31 90 top
C168  47PF-0402_TIGHT-25V-5%-X7R  [0402-TIGHT]  9.84,82.93 90 top
C169  0.1uF  [0402-TIGHT]  10.67,70.23 270 top
C170  1.0uF  [0402-TIGHT]  14.61,67.06 90 top
C171  2.2uF  [0402-TIGHT]  20.13,51.31 90 bottom
C172  2.2uF  [0402-TIGHT]  26.61,51.37 90 bottom
C173  2.2uF  [0402-TIGHT]  25.97,78.99 0 top
C174  0.1uF  [0402-TIGHT]  25.97,77.98 0 top
C175  2.2uF  [0402-TIGHT]  18.86,87.44 90 top
C176  2.2uF  [0402-TIGHT]  27.88,87.44 90 top
C177  4.7uF  [0402-TIGHT]  20.19,75.31 90 top
C178  47PF-0402_TIGHT-25V-5%-X7R  [0402-TIGHT]  21.02,82.93 90 top
C179  0.1uF  [0402-TIGHT]  21.84,70.23 270 top
C180  1.0uF  [0402-TIGHT]  25.78,67.06 90 top
C181  2.2uF  [0402-TIGHT]  31.31,51.31 90 bottom
C182  2.2uF  [0402-TIGHT]  37.78,51.37 90 bottom
C183  2.2uF  [0402-TIGHT]  37.15,78.99 0 top
C184  0.1uF  [0402-TIGHT]  37.15,77.98 0 top
C185  2.2uF  [0402-TIGHT]  30.04,87.44 90 top
C186  2.2uF  [0402-TIGHT]  39.05,87.44 90 top
C187  4.7uF  [0402-TIGHT]  31.37,75.31 90 top
C188  47PF-0402_TIGHT-25V-5%-X7R  [0402-TIGHT]  32.19,82.93 90 top
C189  0.1uF  [0402-TIGHT]  33.02,70.23 270 top
C190  1.0uF  [0402-TIGHT]  36.96,67.06 90 top
C191  2.2uF  [0402-TIGHT]  42.48,51.31 90 bottom
C192  2.2uF  [0402-TIGHT]  48.96,51.37 90 bottom
C193  2.2uF  [0402-TIGHT]  48.32,78.99 0 top
C194  0.1uF  [0402-TIGHT]  48.32,77.98 0 top
C195  2.2uF  [0402-TIGHT]  41.21,87.44 90 top
C196  2.2uF  [0402-TIGHT]  50.23,87.44 90 top
C197  4.7uF  [0402-TIGHT]  42.54,75.31 90 top
C198  47PF-0402_TIGHT-25V-5%-X7R  [0402-TIGHT]  43.37,82.93 90 top
C199  0.1uF  [0402-TIGHT]  44.2,70.23 270 top
C200  1.0uF  [0402-TIGHT]  48.13,67.06 90 top
C201  2.2uF  [0402-TIGHT]  53.66,51.31 90 bottom
C202  2.2uF  [0402-TIGHT]  60.13,51.37 90 bottom
C203  2.2uF  [0402-TIGHT]  59.5,78.99 0 top
C204  0.1uF  [0402-TIGHT]  59.5,77.98 0 top
C205  2.2uF  [0402-TIGHT]  52.39,87.44 90 top
C206  2.2uF  [0402-TIGHT]  61.4,87.44 90 top
C207  4.7uF  [0402-TIGHT]  53.72,75.31 90 top
C208  47PF-0402_TIGHT-25V-5%-X7R  [0402-TIGHT]  54.55,82.93 90 top
C209  0.1uF  [0402-TIGHT]  55.37,70.23 270 top
C210  1.0uF  [0402-TIGHT]  59.31,67.06 90 top
C211  2.2uF  [0402-TIGHT]  64.83,51.31 90 bottom
C212  2.2uF  [0402-TIGHT]  71.31,51.37 90 bottom
C213  2.2uF  [0402-TIGHT]  70.68,78.99 0 top
C214  0.1uF  [0402-TIGHT]  70.68,77.98 0 top
C215  2.2uF  [0402-TIGHT]  63.56,87.44 90 top
C216  2.2uF  [0402-TIGHT]  72.58,87.44 90 top
C217  4.7uF  [0402-TIGHT]  64.9,75.31 90 top
C218  47PF-0402_TIGHT-25V-5%-X7R  [0402-TIGHT]  65.72,82.93 90 top
C219  0.1uF  [0402-TIGHT]  66.55,70.23 270 top
C220  1.0uF  [0402-TIGHT]  70.48,67.06 90 top
C221  2.2uF  [0402-TIGHT]  76.01,51.31 90 bottom
C222  2.2uF  [0402-TIGHT]  82.49,51.37 90 bottom
C223  2.2uF  [0402-TIGHT]  81.85,78.99 0 top
C224  0.1uF  [0402-TIGHT]  81.85,77.98 0 top
C225  2.2uF  [0402-TIGHT]  74.74,87.44 90 top
C226  2.2uF  [0402-TIGHT]  83.76,87.44 90 top
C227  4.7uF  [0402-TIGHT]  76.07,75.31 90 top
C228  47PF-0402_TIGHT-25V-5%-X7R  [0402-TIGHT]  76.9,82.93 90 top
C229  0.1uF  [0402-TIGHT]  77.72,70.23 270 top
C230  1.0uF  [0402-TIGHT]  81.66,67.06 90 top
C231  2.2uF  [0402-TIGHT]  87.19,51.31 90 bottom
C232  2.2uF  [0402-TIGHT]  93.66,51.37 90 bottom
C233  2.2uF  [0402-TIGHT]  93.03,78.99 0 top
C234  0.1uF  [0402-TIGHT]  93.03,77.98 0 top
C235  2.2uF  [0402-TIGHT]  85.92,87.44 90 top
C236  2.2uF  [0402-TIGHT]  94.93,87.44 90 top
C237  4.7uF  [0402-TIGHT]  87.25,75.31 90 top
C238  47PF-0402_TIGHT-25V-5%-X7R  [0402-TIGHT]  88.07,82.93 90 top
C239  0.1uF  [0402-TIGHT]  88.9,70.23 270 top
C240  1.0uF  [0402-TIGHT]  92.84,67.06 90 top
C241  2.2uF  [0402-TIGHT]  98.36,51.31 90 bottom
C242  2.2uF  [0402-TIGHT]  104.84,51.37 90 bottom
C243  2.2uF  [0402-TIGHT]  104.2,78.99 0 top
C244  0.1uF  [0402-TIGHT]  104.2,77.98 0 top
C245  2.2uF  [0402-TIGHT]  97.09,87.44 90 top
C246  2.2uF  [0402-TIGHT]  106.11,87.44 90 top
C247  4.7uF  [0402-TIGHT]  98.42,75.31 90 top
C248  47PF-0402_TIGHT-25V-5%-X7R  [0402-TIGHT]  99.25,82.93 90 top
C249  0.1uF  [0402-TIGHT]  100.08,70.23 270 top
C250  1.0uF  [0402-TIGHT]  104.01,67.06 90 top
C251  2.2uF  [0402-TIGHT]  109.54,51.31 90 bottom
C252  2.2uF  [0402-TIGHT]  116.01,51.37 90 bottom
C253  2.2uF  [0402-TIGHT]  115.38,78.99 0 top
C254  0.1uF  [0402-TIGHT]  115.38,77.98 0 top
C255  2.2uF  [0402-TIGHT]  108.27,87.44 90 top
C256  2.2uF  [0402-TIGHT]  117.28,87.44 90 top
C257  4.7uF  [0402-TIGHT]  109.6,75.31 90 top
C258  47PF-0402_TIGHT-25V-5%-X7R  [0402-TIGHT]  110.43,82.93 90 top
C259  0.1uF  [0402-TIGHT]  111.25,70.23 270 top
C260  1.0uF  [0402-TIGHT]  115.19,67.06 90 top
C261  2.2uF  [0402-TIGHT]  120.71,51.31 90 bottom
C262  2.2uF  [0402-TIGHT]  127.19,51.37 90 bottom
C263  2.2uF  [0402-TIGHT]  126.56,78.99 0 top
C264  0.1uF  [0402-TIGHT]  126.56,77.98 0 top
C265  2.2uF  [0402-TIGHT]  119.44,87.44 90 top
C266  2.2uF  [0402-TIGHT]  128.46,87.44 90 top
C267  4.7uF  [0402-TIGHT]  120.78,75.31 90 top
C268  47PF-0402_TIGHT-25V-5%-X7R  [0402-TIGHT]  121.6,82.93 90 top
C269  0.1uF  [0402-TIGHT]  122.43,70.23 270 top
C270  1.0uF  [0402-TIGHT]  126.37,67.06 90 top
C271  2.2uF  [0402-TIGHT]  131.89,51.31 90 bottom
C272  2.2uF  [0402-TIGHT]  138.37,51.37 90 bottom
C273  2.2uF  [0402-TIGHT]  137.73,78.99 0 top
C274  0.1uF  [0402-TIGHT]  137.73,77.98 0 top
C275  2.2uF  [0402-TIGHT]  130.62,87.44 90 top
C276  2.2uF  [0402-TIGHT]  139.64,87.44 90 top
C277  4.7uF  [0402-TIGHT]  131.95,75.31 90 top
C278  47PF-0402_TIGHT-25V-5%-X7R  [0402-TIGHT]  132.78,82.93 90 top
C279  0.1uF  [0402-TIGHT]  133.6,70.23 270 top
C280  1.0uF  [0402-TIGHT]  137.54,67.06 90 top
C281  2.2uF  [0402-TIGHT]  143.07,51.31 90 bottom
C282  2.2uF  [0402-TIGHT]  149.54,51.37 90 bottom
C283  2.2uF  [0402-TIGHT]  148.91,78.99 0 top
C284  0.1uF  [0402-TIGHT]  148.91,77.98 0 top
C285  2.2uF  [0402-TIGHT]  141.8,87.44 90 top
C286  2.2uF  [0402-TIGHT]  150.81,87.44 90 top
C287  4.7uF  [0402-TIGHT]  143.13,75.31 90 top
C288  47PF-0402_TIGHT-25V-5%-X7R  [0402-TIGHT]  143.95,82.93 90 top
C289  0.1uF  [0402-TIGHT]  144.78,70.23 270 top
C290  1.0uF  [0402-TIGHT]  148.72,67.06 90 top
C291  2.2uF  [0402-TIGHT]  154.24,51.31 90 bottom
C292  2.2uF  [0402-TIGHT]  160.72,51.37 90 bottom
C293  2.2uF  [0402-TIGHT]  160.08,78.99 0 top
C294  0.1uF  [0402-TIGHT]  160.08,77.98 0 top
C295  2.2uF  [0402-TIGHT]  152.97,87.44 90 top
C296  2.2uF  [0402-TIGHT]  161.99,87.44 90 top
C297  4.7uF  [0402-TIGHT]  154.31,75.31 90 top
C298  47PF-0402_TIGHT-25V-5%-X7R  [0402-TIGHT]  155.13,82.93 90 top
C299  0.1uF  [0402-TIGHT]  155.96,70.23 270 top
C300  1.0uF  [0402-TIGHT]  159.89,67.06 90 top
C301  2.2uF  [0402-TIGHT]  165.42,51.31 90 bottom
C302  2.2uF  [0402-TIGHT]  171.89,51.37 90 bottom
C303  2.2uF  [0402-TIGHT]  171.26,78.99 0 top
C304  0.1uF  [0402-TIGHT]  171.26,77.98 0 top
C305  2.2uF  [0402-TIGHT]  164.15,87.44 90 top
C306  2.2uF  [0402-TIGHT]  173.16,87.44 90 top
C307  4.7uF  [0402-TIGHT]  165.48,75.31 90 top
C308  47PF-0402_TIGHT-25V-5%-X7R  [0402-TIGHT]  166.31,82.93 90 top
C309  0.1uF  [0402-TIGHT]  167.13,70.23 270 top
C310  1.0uF  [0402-TIGHT]  171.07,67.06 90 top
C311  2.2uF  [0402-TIGHT]  176.59,51.31 90 bottom
C312  2.2uF  [0402-TIGHT]  183.07,51.37 90 bottom
C313  2.2uF  [0402-TIGHT]  182.44,78.99 0 top
C314  0.1uF  [0402-TIGHT]  182.44,77.98 0 top
C315  2.2uF  [0402-TIGHT]  175.32,87.44 90 top
C316  2.2uF  [0402-TIGHT]  184.34,87.44 90 top
C317  4.7uF  [0402-TIGHT]  176.66,75.31 90 top
C318  47PF-0402_TIGHT-25V-5%-X7R  [0402-TIGHT]  177.48,82.93 90 top
C319  0.1uF  [0402-TIGHT]  178.31,70.23 270 top
C320  1.0uF  [0402-TIGHT]  182.25,67.06 90 top
C321  2.2uF  [0402-TIGHT]  8.95,92.46 90 bottom
C322  2.2uF  [0402-TIGHT]  15.43,92.52 90 bottom
C323  2.2uF  [0402-TIGHT]  14.8,120.14 0 top
C324  0.1uF  [0402-TIGHT]  14.8,119.13 0 top
C325  2.2uF  [0402-TIGHT]  7.68,128.59 90 top
C326  2.2uF  [0402-TIGHT]  16.7,128.59 90 top
C327  4.7uF  [0402-TIGHT]  9.02,116.46 90 top
C328  47PF-0402_TIGHT-25V-5%-X7R  [0402-TIGHT]  9.84,124.08 90 top
C329  0.1uF  [0402-TIGHT]  10.67,111.38 270 top
C330  1.0uF  [0402-TIGHT]  14.61,108.2 90 top
C331  2.2uF  [0402-TIGHT]  20.13,92.46 90 bottom
C332  2.2uF  [0402-TIGHT]  26.61,92.52 90 bottom
C333  2.2uF  [0402-TIGHT]  25.97,120.14 0 top
C334  0.1uF  [0402-TIGHT]  25.97,119.13 0 top
C335  2.2uF  [0402-TIGHT]  18.86,128.59 90 top
C336  2.2uF  [0402-TIGHT]  27.88,128.59 90 top
C337  4.7uF  [0402-TIGHT]  20.19,116.46 90 top
C338  47PF-0402_TIGHT-25V-5%-X7R  [0402-TIGHT]  21.02,124.08 90 top
C339  0.1uF  [0402-TIGHT]  21.84,111.38 270 top
C340  1.0uF  [0402-TIGHT]  25.78,108.2 90 top
C341  2.2uF  [0402-TIGHT]  31.31,92.46 90 bottom
C342  2.2uF  [0402-TIGHT]  37.78,92.52 90 bottom
C343  2.2uF  [0402-TIGHT]  37.15,120.14 0 top
C344  0.1uF  [0402-TIGHT]  37.15,119.13 0 top
C345  2.2uF  [0402-TIGHT]  30.04,128.59 90 top
C346  2.2uF  [0402-TIGHT]  39.05,128.59 90 top
C347  4.7uF  [0402-TIGHT]  31.37,116.46 90 top
C348  47PF-0402_TIGHT-25V-5%-X7R  [0402-TIGHT]  32.19,124.08 90 top
C349  0.1uF  [0402-TIGHT]  33.02,111.38 270 top
C350  1.0uF  [0402-TIGHT]  36.96,108.2 90 top
C351  2.2uF  [0402-TIGHT]  42.48,92.46 90 bottom
C352  2.2uF  [0402-TIGHT]  48.96,92.52 90 bottom
C353  2.2uF  [0402-TIGHT]  48.32,120.14 0 top
C354  0.1uF  [0402-TIGHT]  48.32,119.13 0 top
C355  2.2uF  [0402-TIGHT]  41.21,128.59 90 top
C356  2.2uF  [0402-TIGHT]  50.23,128.59 90 top
C357  4.7uF  [0402-TIGHT]  42.54,116.46 90 top
C358  47PF-0402_TIGHT-25V-5%-X7R  [0402-TIGHT]  43.37,124.08 90 top
C359  0.1uF  [0402-TIGHT]  44.2,111.38 270 top
C360  1.0uF  [0402-TIGHT]  48.13,108.2 90 top
C361  2.2uF  [0402-TIGHT]  53.66,92.46 90 bottom
C362  2.2uF  [0402-TIGHT]  60.13,92.52 90 bottom
C363  2.2uF  [0402-TIGHT]  59.5,120.14 0 top
C364  0.1uF  [0402-TIGHT]  59.5,119.13 0 top
C365  2.2uF  [0402-TIGHT]  52.39,128.59 90 top
C366  2.2uF  [0402-TIGHT]  61.4,128.59 90 top
C367  4.7uF  [0402-TIGHT]  53.72,116.46 90 top
C368  47PF-0402_TIGHT-25V-5%-X7R  [0402-TIGHT]  54.55,124.08 90 top
C369  0.1uF  [0402-TIGHT]  55.37,111.38 270 top
C370  1.0uF  [0402-TIGHT]  59.31,108.2 90 top
C371  2.2uF  [0402-TIGHT]  64.83,92.46 90 bottom
C372  2.2uF  [0402-TIGHT]  71.31,92.52 90 bottom
C373  2.2uF  [0402-TIGHT]  70.68,120.14 0 top
C374  0.1uF  [0402-TIGHT]  70.68,119.13 0 top
C375  2.2uF  [0402-TIGHT]  63.56,128.59 90 top
C376  2.2uF  [0402-TIGHT]  72.58,128.59 90 top
C377  4.7uF  [0402-TIGHT]  64.9,116.46 90 top
C378  47PF-0402_TIGHT-25V-5%-X7R  [0402-TIGHT]  65.72,124.08 90 top
C379  0.1uF  [0402-TIGHT]  66.55,111.38 270 top
C380  1.0uF  [0402-TIGHT]  70.48,108.2 90 top
C381  2.2uF  [0402-TIGHT]  76.01,92.46 90 bottom
C382  2.2uF  [0402-TIGHT]  82.49,92.52 90 bottom
C383  2.2uF  [0402-TIGHT]  81.85,120.14 0 top
C384  0.1uF  [0402-TIGHT]  81.85,119.13 0 top
C385  2.2uF  [0402-TIGHT]  74.74,128.59 90 top
C386  2.2uF  [0402-TIGHT]  83.76,128.59 90 top
C387  4.7uF  [0402-TIGHT]  76.07,116.46 90 top
C388  47PF-0402_TIGHT-25V-5%-X7R  [0402-TIGHT]  76.9,124.08 90 top
C389  0.1uF  [0402-TIGHT]  77.72,111.38 270 top
C390  1.0uF  [0402-TIGHT]  81.66,108.2 90 top
C391  2.2uF  [0402-TIGHT]  87.19,92.46 90 bottom
C392  2.2uF  [0402-TIGHT]  93.66,92.52 90 bottom
C393  2.2uF  [0402-TIGHT]  93.03,120.14 0 top
C394  0.1uF  [0402-TIGHT]  93.03,119.13 0 top
C395  2.2uF  [0402-TIGHT]  85.92,128.59 90 top
C396  2.2uF  [0402-TIGHT]  94.93,128.59 90 top
C397  4.7uF  [0402-TIGHT]  87.25,116.46 90 top
C398  47PF-0402_TIGHT-25V-5%-X7R  [0402-TIGHT]  88.07,124.08 90 top
C399  0.1uF  [0402-TIGHT]  88.9,111.38 270 top
C400  1.0uF  [0402-TIGHT]  92.84,108.2 90 top
C401  2.2uF  [0402-TIGHT]  98.36,92.46 90 bottom
C402  2.2uF  [0402-TIGHT]  104.84,92.52 90 bottom
C403  2.2uF  [0402-TIGHT]  104.2,120.14 0 top
C404  0.1uF  [0402-TIGHT]  104.2,119.13 0 top
C405  2.2uF  [0402-TIGHT]  97.09,128.59 90 top
C406  2.2uF  [0402-TIGHT]  106.11,128.59 90 top
C407  4.7uF  [0402-TIGHT]  98.42,116.46 90 top
C408  47PF-0402_TIGHT-25V-5%-X7R  [0402-TIGHT]  99.25,124.08 90 top
C409  0.1uF  [0402-TIGHT]  100.08,111.38 270 top
C410  1.0uF  [0402-TIGHT]  104.01,108.2 90 top
C411  2.2uF  [0402-TIGHT]  109.54,92.46 90 bottom
C412  2.2uF  [0402-TIGHT]  116.01,92.52 90 bottom
C413  2.2uF  [0402-TIGHT]  115.38,120.14 0 top
C414  0.1uF  [0402-TIGHT]  115.38,119.13 0 top
C415  2.2uF  [0402-TIGHT]  108.27,128.59 90 top
C416  2.2uF  [0402-TIGHT]  117.28,128.59 90 top
C417  4.7uF  [0402-TIGHT]  109.6,116.46 90 top
C418  47PF-0402_TIGHT-25V-5%-X7R  [0402-TIGHT]  110.43,124.08 90 top
C419  0.1uF  [0402-TIGHT]  111.25,111.38 270 top
C420  1.0uF  [0402-TIGHT]  115.19,108.2 90 top
C421  2.2uF  [0402-TIGHT]  120.71,92.46 90 bottom
C422  2.2uF  [0402-TIGHT]  127.19,92.52 90 bottom
C423  2.2uF  [0402-TIGHT]  126.56,120.14 0 top
C424  0.1uF  [0402-TIGHT]  126.56,119.13 0 top
C425  2.2uF  [0402-TIGHT]  119.44,128.59 90 top
C426  2.2uF  [0402-TIGHT]  128.46,128.59 90 top
C427  4.7uF  [0402-TIGHT]  120.78,116.46 90 top
C428  47PF-0402_TIGHT-25V-5%-X7R  [0402-TIGHT]  121.6,124.08 90 top
C429  0.1uF  [0402-TIGHT]  122.43,111.38 270 top
C430  1.0uF  [0402-TIGHT]  126.37,108.2 90 top
C431  2.2uF  [0402-TIGHT]  131.89,92.46 90 bottom
C432  2.2uF  [0402-TIGHT]  138.37,92.52 90 bottom
C433  2.2uF  [0402-TIGHT]  137.73,120.14 0 top
C434  0.1uF  [0402-TIGHT]  137.73,119.13 0 top
C435  2.2uF  [0402-TIGHT]  130.62,128.59 90 top
C436  2.2uF  [0402-TIGHT]  139.64,128.59 90 top
C437  4.7uF  [0402-TIGHT]  131.95,116.46 90 top
C438  47PF-0402_TIGHT-25V-5%-X7R  [0402-TIGHT]  132.78,124.08 90 top
C439  0.1uF  [0402-TIGHT]  133.6,111.38 270 top
C440  1.0uF  [0402-TIGHT]  137.54,108.2 90 top
C441  2.2uF  [0402-TIGHT]  143.07,92.46 90 bottom
C442  2.2uF  [0402-TIGHT]  149.54,92.52 90 bottom
C443  2.2uF  [0402-TIGHT]  148.91,120.14 0 top
C444  0.1uF  [0402-TIGHT]  148.91,119.13 0 top
C445  2.2uF  [0402-TIGHT]  141.8,128.59 90 top
C446  2.2uF  [0402-TIGHT]  150.81,128.59 90 top
C447  4.7uF  [0402-TIGHT]  143.13,116.46 90 top
C448  47PF-0402_TIGHT-25V-5%-X7R  [0402-TIGHT]  143.95,124.08 90 top
C449  0.1uF  [0402-TIGHT]  144.78,111.38 270 top
C450  1.0uF  [0402-TIGHT]  148.72,108.2 90 top
C451  2.2uF  [0402-TIGHT]  154.24,92.46 90 bottom
C452  2.2uF  [0402-TIGHT]  160.72,92.52 90 bottom
C453  2.2uF  [0402-TIGHT]  160.08,120.14 0 top
C454  0.1uF  [0402-TIGHT]  160.08,119.13 0 top
C455  2.2uF  [0402-TIGHT]  152.97,128.59 90 top
C456  2.2uF  [0402-TIGHT]  161.99,128.59 90 top
C457  4.7uF  [0402-TIGHT]  154.31,116.46 90 top
C458  47PF-0402_TIGHT-25V-5%-X7R  [0402-TIGHT]  155.13,124.08 90 top
C459  0.1uF  [0402-TIGHT]  155.96,111.38 270 top
C460  1.0uF  [0402-TIGHT]  159.89,108.2 90 top
C461  2.2uF  [0402-TIGHT]  165.42,92.46 90 bottom
C462  2.2uF  [0402-TIGHT]  171.89,92.52 90 bottom
C463  2.2uF  [0402-TIGHT]  171.26,120.14 0 top
C464  0.1uF  [0402-TIGHT]  171.26,119.13 0 top
C465  2.2uF  [0402-TIGHT]  164.15,128.59 90 top
C466  2.2uF  [0402-TIGHT]  173.16,128.59 90 top
C467  4.7uF  [0402-TIGHT]  165.48,116.46 90 top
C468  47PF-0402_TIGHT-25V-5%-X7R  [0402-TIGHT]  166.31,124.08 90 top
C469  0.1uF  [0402-TIGHT]  167.13,111.38 270 top
C470  1.0uF  [0402-TIGHT]  171.07,108.2 90 top
C471  2.2uF  [0402-TIGHT]  176.59,92.46 90 bottom
C472  2.2uF  [0402-TIGHT]  183.07,92.52 90 bottom
C473  2.2uF  [0402-TIGHT]  182.44,120.14 0 top
C474  0.1uF  [0402-TIGHT]  182.44,119.13 0 top
C475  2.2uF  [0402-TIGHT]  175.32,128.59 90 top
C476  2.2uF  [0402-TIGHT]  184.34,128.59 90 top
C477  4.7uF  [0402-TIGHT]  176.66,116.46 90 top
C478  47PF-0402_TIGHT-25V-5%-X7R  [0402-TIGHT]  177.48,124.08 90 top
C479  0.1uF  [0402-TIGHT]  178.31,111.38 270 top
C480  1.0uF  [0402-TIGHT]  182.25,108.2 90 top
D1  1A/23V/620mV  [SOD-323]  12.19,26.73 0 top
D2  PESD0402  [0402]  11.62,39.31 0 top
D3  1A/23V/620mV  [SOD-323]  23.37,26.73 0 top
D4  PESD0402  [0402]  22.8,39.31 0 top
D5  1A/23V/620mV  [SOD-323]  34.54,26.73 0 top
D6  PESD0402  [0402]  33.97,39.31 0 top
D7  1A/23V/620mV  [SOD-323]  45.72,26.73 0 top
D8  PESD0402  [0402]  45.15,39.31 0 top
D9  1A/23V/620mV  [SOD-323]  56.9,26.73 0 top
D10  PESD0402  [0402]  56.32,39.31 0 top
D11  1A/23V/620mV  [SOD-323]  68.07,26.73 0 top
D12  PESD0402  [0402]  67.5,39.31 0 top
D13  1A/23V/620mV  [SOD-323]  79.25,26.73 0 top
D14  PESD0402  [0402]  78.68,39.31 0 top
D15  1A/23V/620mV  [SOD-323]  90.42,26.73 0 top
D16  PESD0402  [0402]  89.85,39.31 0 top
D17  1A/23V/620mV  [SOD-323]  101.6,26.73 0 top
D18  PESD0402  [0402]  101.03,39.31 0 top
D19  1A/23V/620mV  [SOD-323]  112.78,26.73 0 top
D20  PESD0402  [0402]  112.2,39.31 0 top
D21  1A/23V/620mV  [SOD-323]  123.95,26.73 0 top
D22  PESD0402  [0402]  123.38,39.31 0 top
D23  1A/23V/620mV  [SOD-323]  135.13,26.73 0 top
D24  PESD0402  [0402]  134.56,39.31 0 top
D25  1A/23V/620mV  [SOD-323]  146.3,26.73 0 top
D26  PESD0402  [0402]  145.73,39.31 0 top
D27  1A/23V/620mV  [SOD-323]  157.48,26.73 0 top
D28  PESD0402  [0402]  156.91,39.31 0 top
D29  1A/23V/620mV  [SOD-323]  168.66,26.73 0 top
D30  PESD0402  [0402]  168.08,39.31 0 top
D31  1A/23V/620mV  [SOD-323]  179.83,26.73 0 top
D32  PESD0402  [0402]  179.26,39.31 0 top
D33  1A/23V/620mV  [SOD-323]  12.19,67.88 0 top
D34  PESD0402  [0402]  11.62,80.45 0 top
D35  1A/23V/620mV  [SOD-323]  23.37,67.88 0 top
D36  PESD0402  [0402]  22.8,80.45 0 top
D37  1A/23V/620mV  [SOD-323]  34.54,67.88 0 top
D38  PESD0402  [0402]  33.97,80.45 0 top
D39  1A/23V/620mV  [SOD-323]  45.72,67.88 0 top
D40  PESD0402  [0402]  45.15,80.45 0 top
D41  1A/23V/620mV  [SOD-323]  56.9,67.88 0 top
D42  PESD0402  [0402]  56.32,80.45 0 top
D43  1A/23V/620mV  [SOD-323]  68.07,67.88 0 top
D44  PESD0402  [0402]  67.5,80.45 0 top
D45  1A/23V/620mV  [SOD-323]  79.25,67.88 0 top
D46  PESD0402  [0402]  78.68,80.45 0 top
D47  1A/23V/620mV  [SOD-323]  90.42,67.88 0 top
D48  PESD0402  [0402]  89.85,80.45 0 top
D49  1A/23V/620mV  [SOD-323]  101.6,67.88 0 top
D50  PESD0402  [0402]  101.03,80.45 0 top
D51  1A/23V/620mV  [SOD-323]  112.78,67.88 0 top
D52  PESD0402  [0402]  112.2,80.45 0 top
D53  1A/23V/620mV  [SOD-323]  123.95,67.88 0 top
D54  PESD0402  [0402]  123.38,80.45 0 top
D55  1A/23V/620mV  [SOD-323]  135.13,67.88 0 top
D56  PESD0402  [0402]  134.56,80.45 0 top
D57  1A/23V/620mV  [SOD-323]  146.3,67.88 0 top
D58  PESD0402  [0402]  145.73,80.45 0 top
D59  1A/23V/620mV  [SOD-323]  157.48,67.88 0 top
D60  PESD0402  [0402]  156.91,80.45 0 top
D61  1A/23V/620mV  [SOD-323]  168.66,67.88 0 top
D62  PESD0402  [0402]  168.08,80.45 0 top
D63  1A/23V/620mV  [SOD-323]  179.83,67.88 0 top
D64  PESD0402  [0402]  179.26,80.45 0 top
D65  1A/23V/620mV  [SOD-323]  12.19,109.03 0 top
D66  PESD0402  [0402]  11.62,121.6 0 top
D67  1A/23V/620mV  [SOD-323]  23.37,109.03 0 top
D68  PESD0402  [0402]  22.8,121.6 0 top
D69  1A/23V/620mV  [SOD-323]  34.54,109.03 0 top
D70  PESD0402  [0402]  33.97,121.6 0 top
D71  1A/23V/620mV  [SOD-323]  45.72,109.03 0 top
D72  PESD0402  [0402]  45.15,121.6 0 top
D73  1A/23V/620mV  [SOD-323]  56.9,109.03 0 top
D74  PESD0402  [0402]  56.32,121.6 0 top
D75  1A/23V/620mV  [SOD-323]  68.07,109.03 0 top
D76  PESD0402  [0402]  67.5,121.6 0 top
D77  1A/23V/620mV  [SOD-323]  79.25,109.03 0 top
D78  PESD0402  [0402]  78.68,121.6 0 top
D79  1A/23V/620mV  [SOD-323]  90.42,109.03 0 top
D80  PESD0402  [0402]  89.85,121.6 0 top
D81  1A/23V/620mV  [SOD-323]  101.6,109.03 0 top
D82  PESD0402  [0402]  101.03,121.6 0 top
D83  1A/23V/620mV  [SOD-323]  112.78,109.03 0 top
D84  PESD0402  [0402]  112.2,121.6 0 top
D85  1A/23V/620mV  [SOD-323]  123.95,109.03 0 top
D86  PESD0402  [0402]  123.38,121.6 0 top
D87  1A/23V/620mV  [SOD-323]  135.13,109.03 0 top
D88  PESD0402  [0402]  134.56,121.6 0 top
D89  1A/23V/620mV  [SOD-323]  146.3,109.03 0 top
D90  PESD0402  [0402]  145.73,121.6 0 top
D91  1A/23V/620mV  [SOD-323]  157.48,109.03 0 top
D92  PESD0402  [0402]  156.91,121.6 0 top
D93  1A/23V/620mV  [SOD-323]  168.66,109.03 0 top
D94  PESD0402  [0402]  168.08,121.6 0 top
D95  1A/23V/620mV  [SOD-323]  179.83,109.03 0 top
D96  PESD0402  [0402]  179.26,121.6 0 top
E$1  [FIDUCIAL-1X2]  13.72,131.89 0 top
E$2  [FIDUCIAL-1X2]  13.72,131.89 0 bottom
E$3  [FIDUCIAL-1X2]  178.24,131.89 0 top
E$4  [FIDUCIAL-1X2]  178.24,131.89 0 bottom
E$5  [FIDUCIAL-1.5X3]  13.72,4.76 0 top
E$6  [FIDUCIAL-1.5X3]  13.72,4.76 0 bottom
FB1  FERRITE_BEAD-120_OHM-0402  [0402]  11.62,40.7 180 top
FB2  FERRITE_BEAD-120_OHM-0402  [0402]  22.8,40.7 180 top
FB3  FERRITE_BEAD-120_OHM-0402  [0402]  33.97,40.7 180 top
FB4  FERRITE_BEAD-120_OHM-0402  [0402]  45.15,40.7 180 top
FB5  FERRITE_BEAD-120_OHM-0402  [0402]  56.32,40.7 180 top
FB6  FERRITE_BEAD-120_OHM-0402  [0402]  67.5,40.7 180 top
FB7  FERRITE_BEAD-120_OHM-0402  [0402]  78.68,40.7 180 top
FB8  FERRITE_BEAD-120_OHM-0402  [0402]  89.85,40.7 180 top
FB9  FERRITE_BEAD-120_OHM-0402  [0402]  101.03,40.7 180 top
FB10  FERRITE_BEAD-120_OHM-0402  [0402]  112.2,40.7 180 top
FB11  FERRITE_BEAD-120_OHM-0402  [0402]  123.38,40.7 180 top
FB12  FERRITE_BEAD-120_OHM-0402  [0402]  134.56,40.7 180 top
FB13  FERRITE_BEAD-120_OHM-0402  [0402]  145.73,40.7 180 top
FB14  FERRITE_BEAD-120_OHM-0402  [0402]  156.91,40.7 180 top
FB15  FERRITE_BEAD-120_OHM-0402  [0402]  168.08,40.7 180 top
FB16  FERRITE_BEAD-120_OHM-0402  [0402]  179.26,40.7 180 top
FB17  FERRITE_BEAD-120_OHM-0402  [0402]  11.62,81.85 180 top
FB18  FERRITE_BEAD-120_OHM-0402  [0402]  22.8,81.85 180 top
FB19  FERRITE_BEAD-120_OHM-0402  [0402]  33.97,81.85 180 top
FB20  FERRITE_BEAD-120_OHM-0402  [0402]  45.15,81.85 180 top
FB21  FERRITE_BEAD-120_OHM-0402  [0402]  56.32,81.85 180 top
FB22  FERRITE_BEAD-120_OHM-0402  [0402]  67.5,81.85 180 top
FB23  FERRITE_BEAD-120_OHM-0402  [0402]  78.68,81.85 180 top
FB24  FERRITE_BEAD-120_OHM-0402  [0402]  89.85,81.85 180 top
FB25  FERRITE_BEAD-120_OHM-0402  [0402]  101.03,81.85 180 top
FB26  FERRITE_BEAD-120_OHM-0402  [0402]  112.2,81.85 180 top
FB27  FERRITE_BEAD-120_OHM-0402  [0402]  123.38,81.85 180 top
FB28  FERRITE_BEAD-120_OHM-0402  [0402]  134.56,81.85 180 top
FB29  FERRITE_BEAD-120_OHM-0402  [0402]  145.73,81.85 180 top
FB30  FERRITE_BEAD-120_OHM-0402  [0402]  156.91,81.85 180 top
FB31  FERRITE_BEAD-120_OHM-0402  [0402]  168.08,81.85 180 top
FB32  FERRITE_BEAD-120_OHM-0402  [0402]  179.26,81.85 180 top
FB33  FERRITE_BEAD-120_OHM-0402  [0402]  11.62,123 180 top
FB34  FERRITE_BEAD-120_OHM-0402  [0402]  22.8,123 180 top
FB35  FERRITE_BEAD-120_OHM-0402  [0402]  33.97,123 180 top
FB36  FERRITE_BEAD-120_OHM-0402  [0402]  45.15,123 180 top
FB37  FERRITE_BEAD-120_OHM-0402  [0402]  56.32,123 180 top
FB38  FERRITE_BEAD-120_OHM-0402  [0402]  67.5,123 180 top
FB39  FERRITE_BEAD-120_OHM-0402  [0402]  78.68,123 180 top
FB40  FERRITE_BEAD-120_OHM-0402  [0402]  89.85,123 180 top
FB41  FERRITE_BEAD-120_OHM-0402  [0402]  101.03,123 180 top
FB42  FERRITE_BEAD-120_OHM-0402  [0402]  112.2,123 180 top
FB43  FERRITE_BEAD-120_OHM-0402  [0402]  123.38,123 180 top
FB44  FERRITE_BEAD-120_OHM-0402  [0402]  134.56,123 180 top
FB45  FERRITE_BEAD-120_OHM-0402  [0402]  145.73,123 180 top
FB46  FERRITE_BEAD-120_OHM-0402  [0402]  156.91,123 180 top
FB47  FERRITE_BEAD-120_OHM-0402  [0402]  168.08,123 180 top
FB48  FERRITE_BEAD-120_OHM-0402  [0402]  179.26,123 180 top
FD1  FIDUCIALUFIDUCIAL  [FIDUCIAL-MICRO]  7.49,44.32 0 top
FD2  FIDUCIALUFIDUCIAL  [FIDUCIAL-MICRO]  7.49,46.86 0 bottom
FD3  FIDUCIALUFIDUCIAL  [FIDUCIAL-MICRO]  16.89,7.49 0 top
FD4  FIDUCIALUFIDUCIAL  [FIDUCIAL-MICRO]  16.89,7.49 0 bottom
FD5  FIDUCIALUFIDUCIAL  [FIDUCIAL-MICRO]  18.67,44.32 0 top
FD6  FIDUCIALUFIDUCIAL  [FIDUCIAL-MICRO]  18.67,46.86 0 bottom
FD7  FIDUCIALUFIDUCIAL  [FIDUCIAL-MICRO]  28.07,7.49 0 top
FD8  FIDUCIALUFIDUCIAL  [FIDUCIAL-MICRO]  28.07,7.49 0 bottom
FD9  FIDUCIALUFIDUCIAL  [FIDUCIAL-MICRO]  29.84,44.32 0 top
FD10  FIDUCIALUFIDUCIAL  [FIDUCIAL-MICRO]  29.84,46.86 0 bottom
FD11  FIDUCIALUFIDUCIAL  [FIDUCIAL-MICRO]  39.24,7.49 0 top
FD12  FIDUCIALUFIDUCIAL  [FIDUCIAL-MICRO]  39.24,7.49 0 bottom
FD13  FIDUCIALUFIDUCIAL  [FIDUCIAL-MICRO]  41.02,44.32 0 top
FD14  FIDUCIALUFIDUCIAL  [FIDUCIAL-MICRO]  41.02,46.86 0 bottom
FD15  FIDUCIALUFIDUCIAL  [FIDUCIAL-MICRO]  50.42,7.49 0 top
FD16  FIDUCIALUFIDUCIAL  [FIDUCIAL-MICRO]  50.42,7.49 0 bottom
FD17  FIDUCIALUFIDUCIAL  [FIDUCIAL-MICRO]  52.2,44.32 0 top
FD18  FIDUCIALUFIDUCIAL  [FIDUCIAL-MICRO]  52.2,46.86 0 bottom
FD19  FIDUCIALUFIDUCIAL  [FIDUCIAL-MICRO]  61.59,7.49 0 top
FD20  FIDUCIALUFIDUCIAL  [FIDUCIAL-MICRO]  61.59,7.49 0 bottom
FD21  FIDUCIALUFIDUCIAL  [FIDUCIAL-MICRO]  63.37,44.32 0 top
FD22  FIDUCIALUFIDUCIAL  [FIDUCIAL-MICRO]  63.37,46.86 0 bottom
FD23  FIDUCIALUFIDUCIAL  [FIDUCIAL-MICRO]  72.77,7.49 0 top
FD24  FIDUCIALUFIDUCIAL  [FIDUCIAL-MICRO]  72.77,7.49 0 bottom
FD25  FIDUCIALUFIDUCIAL  [FIDUCIAL-MICRO]  74.55,44.32 0 top
FD26  FIDUCIALUFIDUCIAL  [FIDUCIAL-MICRO]  74.55,46.86 0 bottom
FD27  FIDUCIALUFIDUCIAL  [FIDUCIAL-MICRO]  83.95,7.49 0 top
FD28  FIDUCIALUFIDUCIAL  [FIDUCIAL-MICRO]  83.95,7.49 0 bottom
FD29  FIDUCIALUFIDUCIAL  [FIDUCIAL-MICRO]  85.73,44.32 0 top
FD30  FIDUCIALUFIDUCIAL  [FIDUCIAL-MICRO]  85.73,46.86 0 bottom
FD31  FIDUCIALUFIDUCIAL  [FIDUCIAL-MICRO]  95.12,7.49 0 top
FD32  FIDUCIALUFIDUCIAL  [FIDUCIAL-MICRO]  95.12,7.49 0 bottom
FD33  FIDUCIALUFIDUCIAL  [FIDUCIAL-MICRO]  96.9,44.32 0 top
FD34  FIDUCIALUFIDUCIAL  [FIDUCIAL-MICRO]  96.9,46.86 0 bottom
FD35  FIDUCIALUFIDUCIAL  [FIDUCIAL-MICRO]  106.3,7.49 0 top
FD36  FIDUCIALUFIDUCIAL  [FIDUCIAL-MICRO]  106.3,7.49 0 bottom
FD37  FIDUCIALUFIDUCIAL  [FIDUCIAL-MICRO]  108.08,44.32 0 top
FD38  FIDUCIALUFIDUCIAL  [FIDUCIAL-MICRO]  108.08,46.86 0 bottom
FD39  FIDUCIALUFIDUCIAL  [FIDUCIAL-MICRO]  117.48,7.49 0 top
FD40  FIDUCIALUFIDUCIAL  [FIDUCIAL-MICRO]  117.48,7.49 0 bottom
FD41  FIDUCIALUFIDUCIAL  [FIDUCIAL-MICRO]  119.25,44.32 0 top
FD42  FIDUCIALUFIDUCIAL  [FIDUCIAL-MICRO]  119.25,46.86 0 bottom
FD43  FIDUCIALUFIDUCIAL  [FIDUCIAL-MICRO]  128.65,7.49 0 top
FD44  FIDUCIALUFIDUCIAL  [FIDUCIAL-MICRO]  128.65,7.49 0 bottom
FD45  FIDUCIALUFIDUCIAL  [FIDUCIAL-MICRO]  130.43,44.32 0 top
FD46  FIDUCIALUFIDUCIAL  [FIDUCIAL-MICRO]  130.43,46.86 0 bottom
FD47  FIDUCIALUFIDUCIAL  [FIDUCIAL-MICRO]  139.83,7.49 0 top
FD48  FIDUCIALUFIDUCIAL  [FIDUCIAL-MICRO]  139.83,7.49 0 bottom
FD49  FIDUCIALUFIDUCIAL  [FIDUCIAL-MICRO]  141.61,44.32 0 top
FD50  FIDUCIALUFIDUCIAL  [FIDUCIAL-MICRO]  141.61,46.86 0 bottom
FD51  FIDUCIALUFIDUCIAL  [FIDUCIAL-MICRO]  151,7.49 0 top
FD52  FIDUCIALUFIDUCIAL  [FIDUCIAL-MICRO]  151,7.49 0 bottom
FD53  FIDUCIALUFIDUCIAL  [FIDUCIAL-MICRO]  152.78,44.32 0 top
FD54  FIDUCIALUFIDUCIAL  [FIDUCIAL-MICRO]  152.78,46.86 0 bottom
FD55  FIDUCIALUFIDUCIAL  [FIDUCIAL-MICRO]  162.18,7.49 0 top
FD56  FIDUCIALUFIDUCIAL  [FIDUCIAL-MICRO]  162.18,7.49 0 bottom
FD57  FIDUCIALUFIDUCIAL  [FIDUCIAL-MICRO]  163.96,44.32 0 top
FD58  FIDUCIALUFIDUCIAL  [FIDUCIAL-MICRO]  163.96,46.86 0 bottom
FD59  FIDUCIALUFIDUCIAL  [FIDUCIAL-MICRO]  173.36,7.49 0 top
FD60  FIDUCIALUFIDUCIAL  [FIDUCIAL-MICRO]  173.36,7.49 0 bottom
FD61  FIDUCIALUFIDUCIAL  [FIDUCIAL-MICRO]  175.13,44.32 0 top
FD62  FIDUCIALUFIDUCIAL  [FIDUCIAL-MICRO]  175.13,46.86 0 bottom
FD63  FIDUCIALUFIDUCIAL  [FIDUCIAL-MICRO]  184.53,7.49 0 top
FD64  FIDUCIALUFIDUCIAL  [FIDUCIAL-MICRO]  184.53,7.49 0 bottom
FD65  FIDUCIALUFIDUCIAL  [FIDUCIAL-MICRO]  7.49,85.47 0 top
FD66  FIDUCIALUFIDUCIAL  [FIDUCIAL-MICRO]  7.49,88.01 0 bottom
FD67  FIDUCIALUFIDUCIAL  [FIDUCIAL-MICRO]  16.89,48.64 0 top
FD68  FIDUCIALUFIDUCIAL  [FIDUCIAL-MICRO]  16.89,48.64 0 bottom
FD69  FIDUCIALUFIDUCIAL  [FIDUCIAL-MICRO]  18.67,85.47 0 top
FD70  FIDUCIALUFIDUCIAL  [FIDUCIAL-MICRO]  18.67,88.01 0 bottom
FD71  FIDUCIALUFIDUCIAL  [FIDUCIAL-MICRO]  28.07,48.64 0 top
FD72  FIDUCIALUFIDUCIAL  [FIDUCIAL-MICRO]  28.07,48.64 0 bottom
FD73  FIDUCIALUFIDUCIAL  [FIDUCIAL-MICRO]  29.84,85.47 0 top
FD74  FIDUCIALUFIDUCIAL  [FIDUCIAL-MICRO]  29.84,88.01 0 bottom
FD75  FIDUCIALUFIDUCIAL  [FIDUCIAL-MICRO]  39.24,48.64 0 top
FD76  FIDUCIALUFIDUCIAL  [FIDUCIAL-MICRO]  39.24,48.64 0 bottom
FD77  FIDUCIALUFIDUCIAL  [FIDUCIAL-MICRO]  41.02,85.47 0 top
FD78  FIDUCIALUFIDUCIAL  [FIDUCIAL-MICRO]  41.02,88.01 0 bottom
FD79  FIDUCIALUFIDUCIAL  [FIDUCIAL-MICRO]  50.42,48.64 0 top
FD80  FIDUCIALUFIDUCIAL  [FIDUCIAL-MICRO]  50.42,48.64 0 bottom
FD81  FIDUCIALUFIDUCIAL  [FIDUCIAL-MICRO]  52.2,85.47 0 top
FD82  FIDUCIALUFIDUCIAL  [FIDUCIAL-MICRO]  52.2,88.01 0 bottom
FD83  FIDUCIALUFIDUCIAL  [FIDUCIAL-MICRO]  61.59,48.64 0 top
FD84  FIDUCIALUFIDUCIAL  [FIDUCIAL-MICRO]  61.59,48.64 0 bottom
FD85  FIDUCIALUFIDUCIAL  [FIDUCIAL-MICRO]  63.37,85.47 0 top
FD86  FIDUCIALUFIDUCIAL  [FIDUCIAL-MICRO]  63.37,88.01 0 bottom
FD87  FIDUCIALUFIDUCIAL  [FIDUCIAL-MICRO]  72.77,48.64 0 top
FD88  FIDUCIALUFIDUCIAL  [FIDUCIAL-MICRO]  72.77,48.64 0 bottom
FD89  FIDUCIALUFIDUCIAL  [FIDUCIAL-MICRO]  74.55,85.47 0 top
FD90  FIDUCIALUFIDUCIAL  [FIDUCIAL-MICRO]  74.55,88.01 0 bottom
FD91  FIDUCIALUFIDUCIAL  [FIDUCIAL-MICRO]  83.95,48.64 0 top
FD92  FIDUCIALUFIDUCIAL  [FIDUCIAL-MICRO]  83.95,48.64 0 bottom
FD93  FIDUCIALUFIDUCIAL  [FIDUCIAL-MICRO]  85.73,85.47 0 top
FD94  FIDUCIALUFIDUCIAL  [FIDUCIAL-MICRO]  85.73,88.01 0 bottom
FD95  FIDUCIALUFIDUCIAL  [FIDUCIAL-MICRO]  95.12,48.64 0 top
FD96  FIDUCIALUFIDUCIAL  [FIDUCIAL-MICRO]  95.12,48.64 0 bottom
FD97  FIDUCIALUFIDUCIAL  [FIDUCIAL-MICRO]  96.9,85.47 0 top
FD98  FIDUCIALUFIDUCIAL  [FIDUCIAL-MICRO]  96.9,88.01 0 bottom
FD99  FIDUCIALUFIDUCIAL  [FIDUCIAL-MICRO]  106.3,48.64 0 top
FD100  FIDUCIALUFIDUCIAL  [FIDUCIAL-MICRO]  106.3,48.64 0 bottom
FD101  FIDUCIALUFIDUCIAL  [FIDUCIAL-MICRO]  108.08,85.47 0 top
FD102  FIDUCIALUFIDUCIAL  [FIDUCIAL-MICRO]  108.08,88.01 0 bottom
FD103  FIDUCIALUFIDUCIAL  [FIDUCIAL-MICRO]  117.48,48.64 0 top
FD104  FIDUCIALUFIDUCIAL  [FIDUCIAL-MICRO]  117.48,48.64 0 bottom
FD105  FIDUCIALUFIDUCIAL  [FIDUCIAL-MICRO]  119.25,85.47 0 top
FD106  FIDUCIALUFIDUCIAL  [FIDUCIAL-MICRO]  119.25,88.01 0 bottom
FD107  FIDUCIALUFIDUCIAL  [FIDUCIAL-MICRO]  128.65,48.64 0 top
FD108  FIDUCIALUFIDUCIAL  [FIDUCIAL-MICRO]  128.65,48.64 0 bottom
FD109  FIDUCIALUFIDUCIAL  [FIDUCIAL-MICRO]  130.43,85.47 0 top
FD110  FIDUCIALUFIDUCIAL  [FIDUCIAL-MICRO]  130.43,88.01 0 bottom
FD111  FIDUCIALUFIDUCIAL  [FIDUCIAL-MICRO]  139.83,48.64 0 top
FD112  FIDUCIALUFIDUCIAL  [FIDUCIAL-MICRO]  139.83,48.64 0 bottom
FD113  FIDUCIALUFIDUCIAL  [FIDUCIAL-MICRO]  141.61,85.47 0 top
FD114  FIDUCIALUFIDUCIAL  [FIDUCIAL-MICRO]  141.61,88.01 0 bottom
FD115  FIDUCIALUFIDUCIAL  [FIDUCIAL-MICRO]  151,48.64 0 top
FD116  FIDUCIALUFIDUCIAL  [FIDUCIAL-MICRO]  151,48.64 0 bottom
FD117  FIDUCIALUFIDUCIAL  [FIDUCIAL-MICRO]  152.78,85.47 0 top
FD118  FIDUCIALUFIDUCIAL  [FIDUCIAL-MICRO]  152.78,88.01 0 bottom
FD119  FIDUCIALUFIDUCIAL  [FIDUCIAL-MICRO]  162.18,48.64 0 top
FD120  FIDUCIALUFIDUCIAL  [FIDUCIAL-MICRO]  162.18,48.64 0 bottom
FD121  FIDUCIALUFIDUCIAL  [FIDUCIAL-MICRO]  163.96,85.47 0 top
FD122  FIDUCIALUFIDUCIAL  [FIDUCIAL-MICRO]  163.96,88.01 0 bottom
FD123  FIDUCIALUFIDUCIAL  [FIDUCIAL-MICRO]  173.36,48.64 0 top
FD124  FIDUCIALUFIDUCIAL  [FIDUCIAL-MICRO]  173.36,48.64 0 bottom
FD125  FIDUCIALUFIDUCIAL  [FIDUCIAL-MICRO]  175.13,85.47 0 top
FD126  FIDUCIALUFIDUCIAL  [FIDUCIAL-MICRO]  175.13,88.01 0 bottom
FD127  FIDUCIALUFIDUCIAL  [FIDUCIAL-MICRO]  184.53,48.64 0 top
FD128  FIDUCIALUFIDUCIAL  [FIDUCIAL-MICRO]  184.53,48.64 0 bottom
FD129  FIDUCIALUFIDUCIAL  [FIDUCIAL-MICRO]  7.49,126.62 0 top
FD130  FIDUCIALUFIDUCIAL  [FIDUCIAL-MICRO]  7.49,129.16 0 bottom
FD131  FIDUCIALUFIDUCIAL  [FIDUCIAL-MICRO]  16.89,89.79 0 top
FD132  FIDUCIALUFIDUCIAL  [FIDUCIAL-MICRO]  16.89,89.79 0 bottom
FD133  FIDUCIALUFIDUCIAL  [FIDUCIAL-MICRO]  18.67,126.62 0 top
FD134  FIDUCIALUFIDUCIAL  [FIDUCIAL-MICRO]  18.67,129.16 0 bottom
FD135  FIDUCIALUFIDUCIAL  [FIDUCIAL-MICRO]  28.07,89.79 0 top
FD136  FIDUCIALUFIDUCIAL  [FIDUCIAL-MICRO]  28.07,89.79 0 bottom
FD137  FIDUCIALUFIDUCIAL  [FIDUCIAL-MICRO]  29.84,126.62 0 top
FD138  FIDUCIALUFIDUCIAL  [FIDUCIAL-MICRO]  29.84,129.16 0 bottom
FD139  FIDUCIALUFIDUCIAL  [FIDUCIAL-MICRO]  39.24,89.79 0 top
FD140  FIDUCIALUFIDUCIAL  [FIDUCIAL-MICRO]  39.24,89.79 0 bottom
FD141  FIDUCIALUFIDUCIAL  [FIDUCIAL-MICRO]  41.02,126.62 0 top
FD142  FIDUCIALUFIDUCIAL  [FIDUCIAL-MICRO]  41.02,129.16 0 bottom
FD143  FIDUCIALUFIDUCIAL  [FIDUCIAL-MICRO]  50.42,89.79 0 top
FD144  FIDUCIALUFIDUCIAL  [FIDUCIAL-MICRO]  50.42,89.79 0 bottom
FD145  FIDUCIALUFIDUCIAL  [FIDUCIAL-MICRO]  52.2,126.62 0 top
FD146  FIDUCIALUFIDUCIAL  [FIDUCIAL-MICRO]  52.2,129.16 0 bottom
FD147  FIDUCIALUFIDUCIAL  [FIDUCIAL-MICRO]  61.59,89.79 0 top
FD148  FIDUCIALUFIDUCIAL  [FIDUCIAL-MICRO]  61.59,89.79 0 bottom
FD149  FIDUCIALUFIDUCIAL  [FIDUCIAL-MICRO]  63.37,126.62 0 top
FD150  FIDUCIALUFIDUCIAL  [FIDUCIAL-MICRO]  63.37,129.16 0 bottom
FD151  FIDUCIALUFIDUCIAL  [FIDUCIAL-MICRO]  72.77,89.79 0 top
FD152  FIDUCIALUFIDUCIAL  [FIDUCIAL-MICRO]  72.77,89.79 0 bottom
FD153  FIDUCIALUFIDUCIAL  [FIDUCIAL-MICRO]  74.55,126.62 0 top
FD154  FIDUCIALUFIDUCIAL  [FIDUCIAL-MICRO]  74.55,129.16 0 bottom
FD155  FIDUCIALUFIDUCIAL  [FIDUCIAL-MICRO]  83.95,89.79 0 top
FD156  FIDUCIALUFIDUCIAL  [FIDUCIAL-MICRO]  83.95,89.79 0 bottom
FD157  FIDUCIALUFIDUCIAL  [FIDUCIAL-MICRO]  85.73,126.62 0 top
FD158  FIDUCIALUFIDUCIAL  [FIDUCIAL-MICRO]  85.73,129.16 0 bottom
FD159  FIDUCIALUFIDUCIAL  [FIDUCIAL-MICRO]  95.12,89.79 0 top
FD160  FIDUCIALUFIDUCIAL  [FIDUCIAL-MICRO]  95.12,89.79 0 bottom
FD161  FIDUCIALUFIDUCIAL  [FIDUCIAL-MICRO]  96.9,126.62 0 top
FD162  FIDUCIALUFIDUCIAL  [FIDUCIAL-MICRO]  96.9,129.16 0 bottom